# EAGLE board RN41_Rootooth Panel v17 (EAGLE 6.4), part 1 of 2
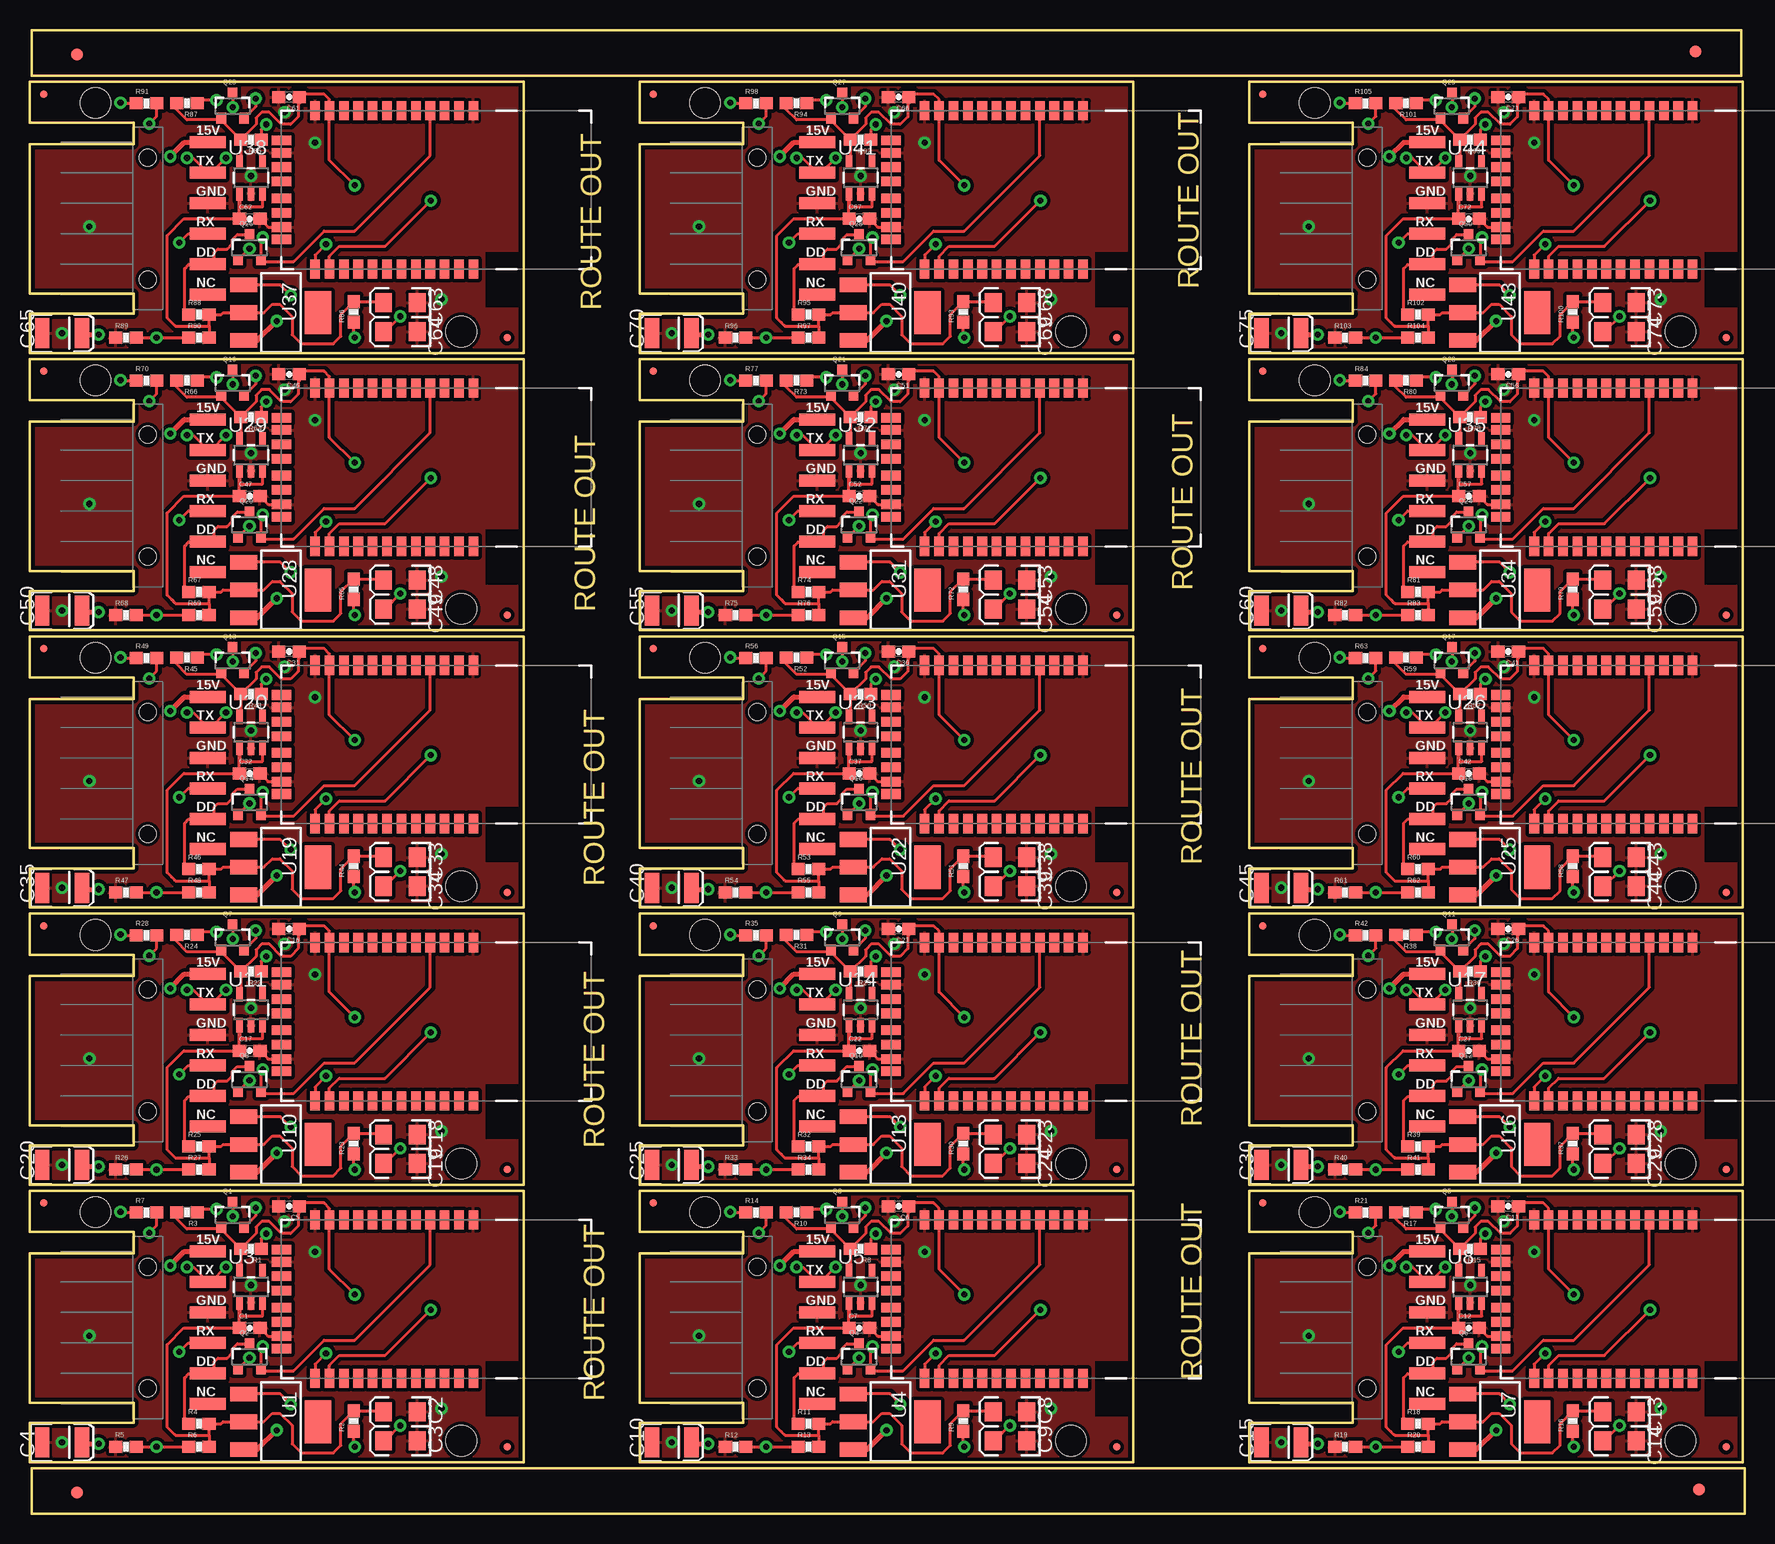
[diagram p0: board, top side]
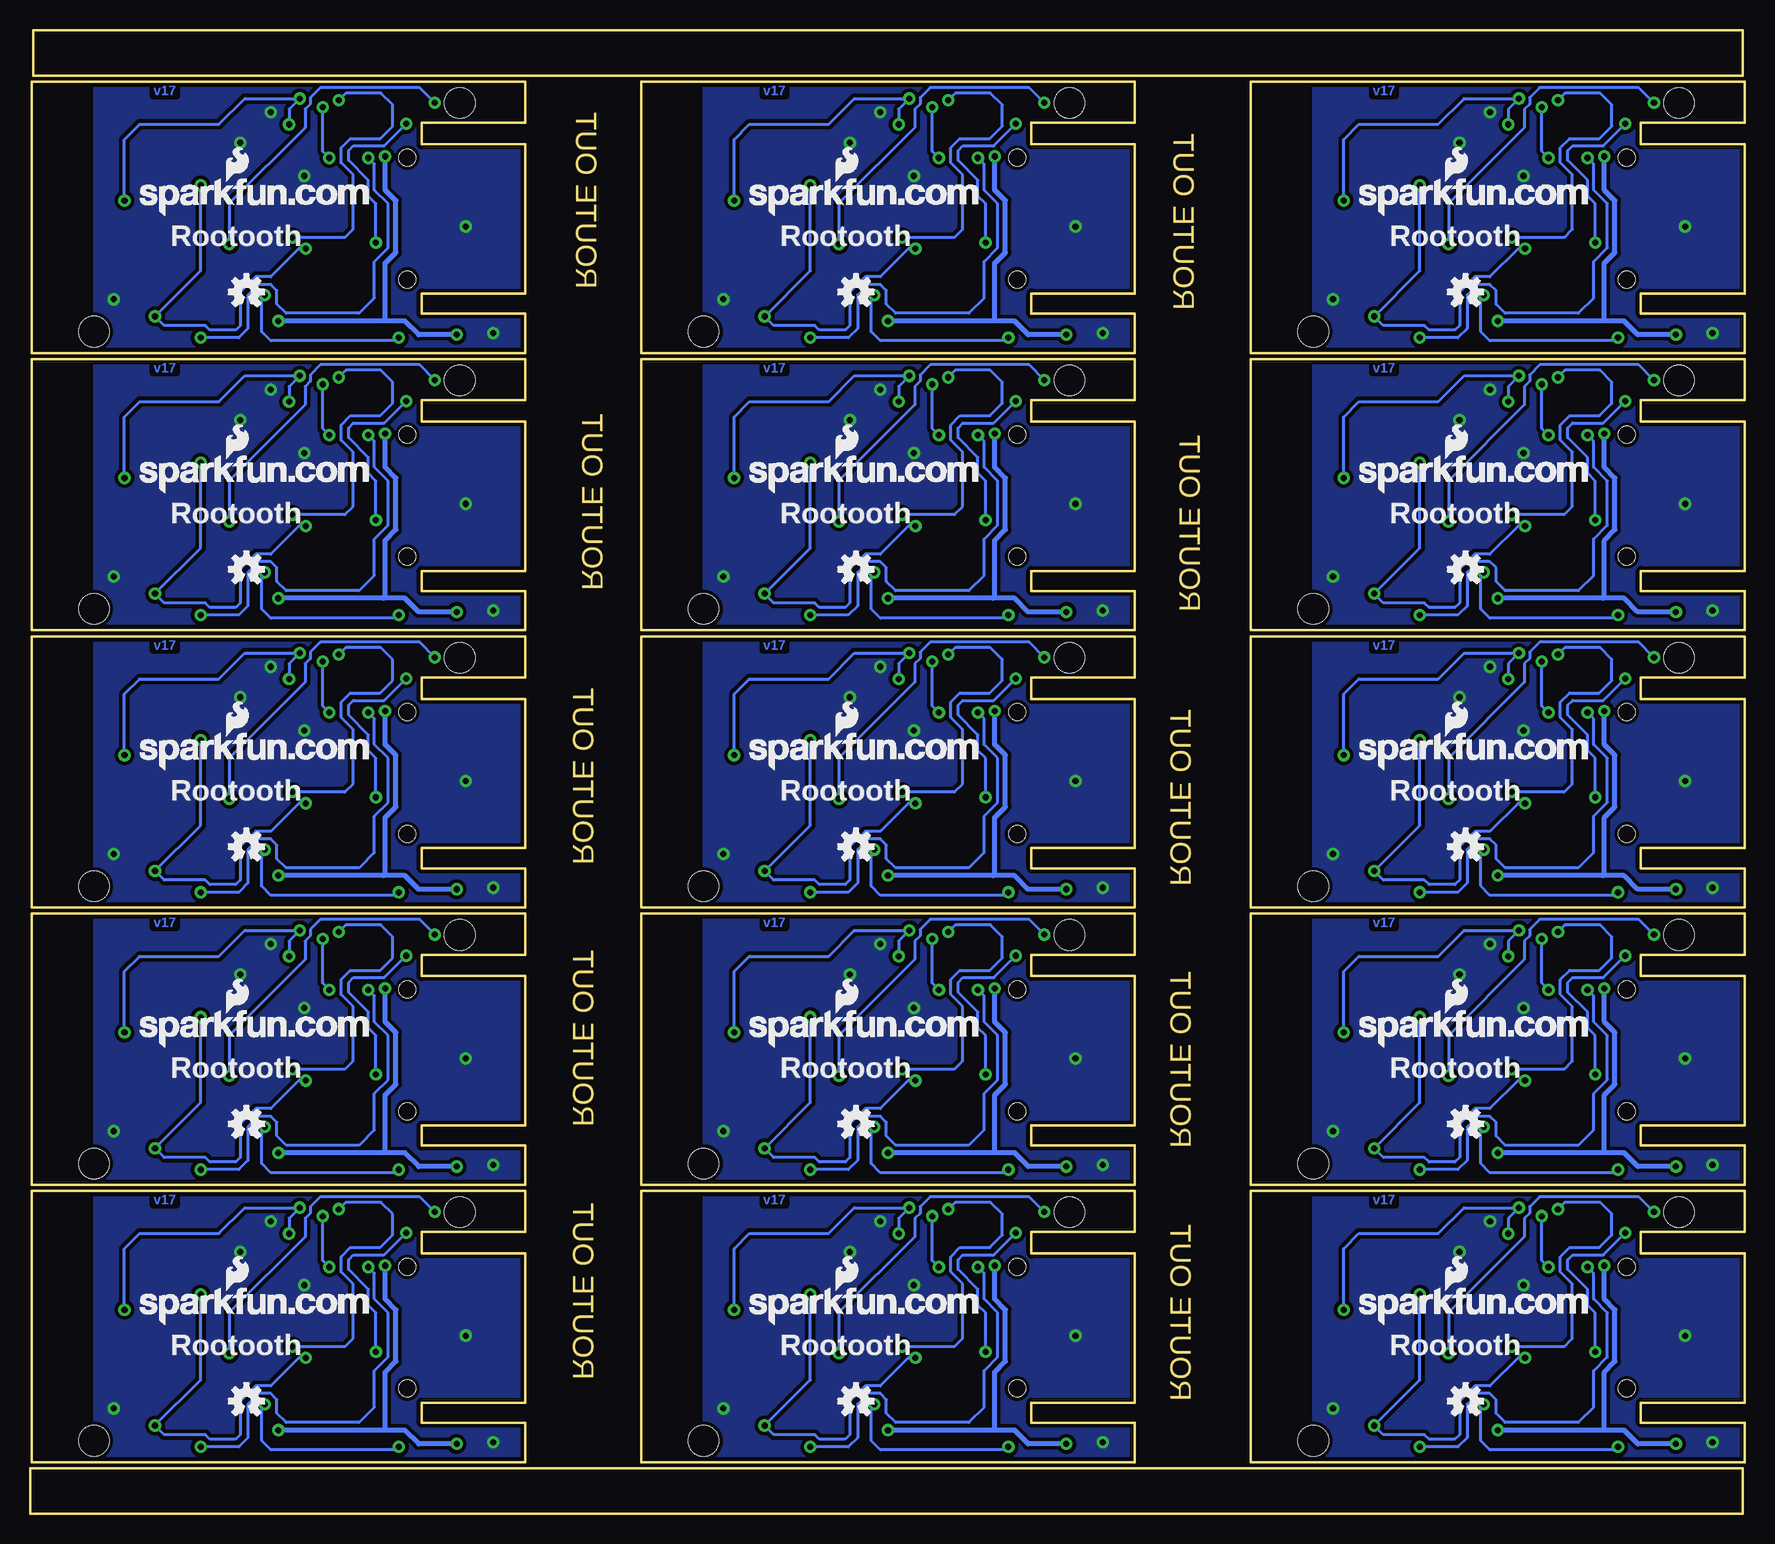
[diagram p1: board, bottom side, seen from below]

Size 142.88 x 123.7 mm. Coordinates in mm from the lower left corner, seen from the top.
Outline: 0,4.32 41.15,4.32 41.15,26.92 0,26.92 0,23.49 8.64,23.49 8.64,21.72 0,21.72 0,9.27 8.64,9.27 8.64,7.59 0,7.59 0,4.32
Outline: 50.8,4.32 91.95,4.32 91.95,26.92 50.8,26.92 50.8,23.49 59.44,23.49 59.44,21.72 50.8,21.72 50.8,9.27 59.44,9.27 59.44,7.59 50.8,7.59 50.8,4.32
Outline: 101.6,4.32 142.75,4.32 142.75,26.92 101.6,26.92 101.6,23.49 110.24,23.49 110.24,21.72 101.6,21.72 101.6,9.27 110.24,9.27 110.24,7.59 101.6,7.59 101.6,4.32
Outline: 0,27.43 41.15,27.43 41.15,50.04 0,50.04 0,46.61 8.64,46.61 8.64,44.83 0,44.83 0,32.38 8.64,32.38 8.64,30.71 0,30.71 0,27.43
Outline: 50.8,27.43 91.95,27.43 91.95,50.04 50.8,50.04 50.8,46.61 59.44,46.61 59.44,44.83 50.8,44.83 50.8,32.38 59.44,32.38 59.44,30.71 50.8,30.71 50.8,27.43
Outline: 101.6,27.43 142.75,27.43 142.75,50.04 101.6,50.04 101.6,46.61 110.24,46.61 110.24,44.83 101.6,44.83 101.6,32.38 110.24,32.38 110.24,30.71 101.6,30.71 101.6,27.43
Outline: 0,50.55 41.15,50.55 41.15,73.15 0,73.15 0,69.72 8.64,69.72 8.64,67.95 0,67.95 0,55.5 8.64,55.5 8.64,53.82 0,53.82 0,50.55
Outline: 50.8,50.55 91.95,50.55 91.95,73.15 50.8,73.15 50.8,69.72 59.44,69.72 59.44,67.95 50.8,67.95 50.8,55.5 59.44,55.5 59.44,53.82 50.8,53.82 50.8,50.55
Outline: 101.6,50.55 142.75,50.55 142.75,73.15 101.6,73.15 101.6,69.72 110.24,69.72 110.24,67.95 101.6,67.95 101.6,55.5 110.24,55.5 110.24,53.82 101.6,53.82 101.6,50.55
Outline: 0,73.66 41.15,73.66 41.15,96.27 0,96.27 0,92.84 8.64,92.84 8.64,91.06 0,91.06 0,78.61 8.64,78.61 8.64,76.94 0,76.94 0,73.66
Outline: 50.8,73.66 91.95,73.66 91.95,96.27 50.8,96.27 50.8,92.84 59.44,92.84 59.44,91.06 50.8,91.06 50.8,78.61 59.44,78.61 59.44,76.94 50.8,76.94 50.8,73.66
Outline: 101.6,73.66 142.75,73.66 142.75,96.27 101.6,96.27 101.6,92.84 110.24,92.84 110.24,91.06 101.6,91.06 101.6,78.61 110.24,78.61 110.24,76.94 101.6,76.94 101.6,73.66
Outline: 0,96.77 41.15,96.77 41.15,119.38 0,119.38 0,115.95 8.64,115.95 8.64,114.17 0,114.17 0,101.73 8.64,101.73 8.64,100.05 0,100.05 0,96.77
Outline: 50.8,96.77 91.95,96.77 91.95,119.38 50.8,119.38 50.8,115.95 59.44,115.95 59.44,114.17 50.8,114.17 50.8,101.73 59.44,101.73 59.44,100.05 50.8,100.05 50.8,96.77
Outline: 101.6,96.77 142.75,96.77 142.75,119.38 101.6,119.38 101.6,115.95 110.24,115.95 110.24,114.17 101.6,114.17 101.6,101.73 110.24,101.73 110.24,100.05 101.6,100.05 101.6,96.77
Outline: 142.88,3.81 0.13,3.81 0.13,0 142.88,0 142.88,3.81
Outline: 142.62,123.7 56.26,123.7 53.72,123.7 0.13,123.7 0.13,119.89 142.62,119.89 142.62,123.7
Copper layers (1*16): Top 0.035mm / dielectric 1.5mm / Bottom 0.035mm
Design rules "SparkFun *": minimum track width 8mil, minimum drill 20mil, track to track 8mil, track to pad 8mil, pad to pad 8mil, via to via 8mil, smd to smd 8mil, copper to edge 10mil, drill to drill 8mil, minimum pad ring 12mil, minimum via ring 10mil, stop-mask expansion 4mil, vias tented up to drill 25mil, thermal gap 10mil
Holes 2.54 mm at 35.94,6.1 5.46,25.15 86.74,6.1 56.26,25.15 137.54,6.1 107.06,25.15 35.94,29.21 5.46,48.26 86.74,29.21 56.26,48.26 137.54,29.21 107.06,48.26 35.94,52.32 5.46,71.37 86.74,52.32 56.26,71.37 137.54,52.32 107.06,71.37 35.94,75.44 5.46,94.49 86.74,75.44 56.26,94.49 137.54,75.44 107.06,94.49 35.94,98.55 5.46,117.6 86.74,98.55 56.26,117.6 137.54,98.55 107.06,117.6

## Footprints (pad centres in the part's own frame; a part is rotated, then mirrored left to right if it is on the bottom)
0603-CAP = smd 1.1 x 1: 1 -0.85,0; 2 0.85,0
EIA3216 = smd 1.4 x 1.6: A 1.4,0; C -1.4,0
EIA3528 = smd 1.2 x 2.5: A 1.65,0; C -1.65,0
FIDUCIAL-1X2 = smd 1 x 1: 1 0,0
MICRO-FIDUCIAL = smd 0.635 x 0.635: 1 0,0
1X06-SMD = smd 1 x 3: 1 -6.35,5; 2 -3.81,5; 3 -1.27,5; 4 1.27,5; 5 3.81,5; 6 6.35,5 | hole 1.4: -5.08,0; 5.08,0
SOT23-3 = smd 0.8 x 0.9: 1 -0.95,-1; 2 0.95,-1; 3 0,1.1
0603-RES = smd 1.1 x 1: 1 -0.85,0; 2 0.85,0
SOT223 = smd 1.219 x 2.235: 1 -2.311,-3.099; 2 0,-3.099; 3 2.311,-3.099 | smd 3.6 x 2.2: 4 0,3.099
RN41 = smd 0.8 x 1.6: 1 -6.6,-6.6; 2 -5.4,-6.6; 3 -4.2,-6.6; 4 -3,-6.6; 5 -1.8,-6.6; 6 -0.6,-6.6; 7 0.6,-6.6; 8 1.8,-6.6; 9 3,-6.6; 10 4.2,-6.6; 11 5.4,-6.6; 12 6.6,-6.6; 13 6.6,6.6; 14 5.4,6.6; 15 4.2,6.6; 16 3,6.6; 17 1.8,6.6; 18 0.6,6.6; 19 -0.6,6.6; 20 -1.8,6.6; 21 -3,6.6; 22 -4.2,6.6; 23 -5.4,6.6; 24 -6.6,6.6 | smd 1.6 x 0.8: 28 9.4,3.1; 29 9.4,-3.1; 30 9.4,4.122; 31 9.4,1.9; 32 9.4,0.7; 33 9.4,-0.7; 34 9.4,-1.9; 35 9.4,-4.122
SOT23-5 = smd 0.55 x 1.2: 1 -0.95,-1.3; 2 0,-1.3; 3 0.95,-1.3; 4 0.95,1.3; 5 -0.95,1.3

## Placement (x,y rotation side)
C1  0.1uF  [0603-CAP]  18.31,15.49 0 top
C2  10uF  [EIA3216]  30.86,8.51 180 top
C3  10uF  [EIA3216]  30.86,6.1 180 top
C4  10uF/20V  [EIA3528]  2.67,5.97 0 top
C5  0.1uF  [0603-CAP]  21.59,25.65 180 top
C6  0.1uF  [0603-CAP]  72.39,25.65 180 top
C7  0.1uF  [0603-CAP]  69.11,15.49 0 top
C8  10uF  [EIA3216]  81.66,8.51 180 top
C9  10uF  [EIA3216]  81.66,6.1 180 top
C10  10uF/20V  [EIA3528]  53.47,5.97 0 top
C11  0.1uF  [0603-CAP]  123.19,25.65 180 top
C12  0.1uF  [0603-CAP]  119.91,15.49 0 top
C13  10uF  [EIA3216]  132.46,8.51 180 top
C14  10uF  [EIA3216]  132.46,6.1 180 top
C15  10uF/20V  [EIA3528]  104.27,5.97 0 top
C16  0.1uF  [0603-CAP]  21.59,48.77 180 top
C17  0.1uF  [0603-CAP]  18.31,38.61 0 top
C18  10uF  [EIA3216]  30.86,31.62 180 top
C19  10uF  [EIA3216]  30.86,29.21 180 top
C20  10uF/20V  [EIA3528]  2.67,29.08 0 top
C21  0.1uF  [0603-CAP]  72.39,48.77 180 top
C22  0.1uF  [0603-CAP]  69.11,38.61 0 top
C23  10uF  [EIA3216]  81.66,31.62 180 top
C24  10uF  [EIA3216]  81.66,29.21 180 top
C25  10uF/20V  [EIA3528]  53.47,29.08 0 top
C26  0.1uF  [0603-CAP]  123.19,48.77 180 top
C27  0.1uF  [0603-CAP]  119.91,38.61 0 top
C28  10uF  [EIA3216]  132.46,31.62 180 top
C29  10uF  [EIA3216]  132.46,29.21 180 top
C30  10uF/20V  [EIA3528]  104.27,29.08 0 top
C31  0.1uF  [0603-CAP]  21.59,71.88 180 top
C32  0.1uF  [0603-CAP]  18.31,61.72 0 top
C33  10uF  [EIA3216]  30.86,54.74 180 top
C34  10uF  [EIA3216]  30.86,52.32 180 top
C35  10uF/20V  [EIA3528]  2.67,52.2 0 top
C36  0.1uF  [0603-CAP]  72.39,71.88 180 top
C37  0.1uF  [0603-CAP]  69.11,61.72 0 top
C38  10uF  [EIA3216]  81.66,54.74 180 top
C39  10uF  [EIA3216]  81.66,52.32 180 top
C40  10uF/20V  [EIA3528]  53.47,52.2 0 top
C41  0.1uF  [0603-CAP]  123.19,71.88 180 top
C42  0.1uF  [0603-CAP]  119.91,61.72 0 top
C43  10uF  [EIA3216]  132.46,54.74 180 top
C44  10uF  [EIA3216]  132.46,52.32 180 top
C45  10uF/20V  [EIA3528]  104.27,52.2 0 top
C46  0.1uF  [0603-CAP]  21.59,95 180 top
C47  0.1uF  [0603-CAP]  18.31,84.84 0 top
C48  10uF  [EIA3216]  30.86,77.85 180 top
C49  10uF  [EIA3216]  30.86,75.44 180 top
C50  10uF/20V  [EIA3528]  2.67,75.31 0 top
C51  0.1uF  [0603-CAP]  72.39,95 180 top
C52  0.1uF  [0603-CAP]  69.11,84.84 0 top
C53  10uF  [EIA3216]  81.66,77.85 180 top
C54  10uF  [EIA3216]  81.66,75.44 180 top
C55  10uF/20V  [EIA3528]  53.47,75.31 0 top
C56  0.1uF  [0603-CAP]  123.19,95 180 top
C57  0.1uF  [0603-CAP]  119.91,84.84 0 top
C58  10uF  [EIA3216]  132.46,77.85 180 top
C59  10uF  [EIA3216]  132.46,75.44 180 top
C60  10uF/20V  [EIA3528]  104.27,75.31 0 top
C61  0.1uF  [0603-CAP]  21.59,118.11 180 top
C62  0.1uF  [0603-CAP]  18.31,107.95 0 top
C63  10uF  [EIA3216]  30.86,100.97 180 top
C64  10uF  [EIA3216]  30.86,98.55 180 top
C65  10uF/20V  [EIA3528]  2.67,98.42 0 top
C66  0.1uF  [0603-CAP]  72.39,118.11 180 top
C67  0.1uF  [0603-CAP]  69.11,107.95 0 top
C68  10uF  [EIA3216]  81.66,100.97 180 top
C69  10uF  [EIA3216]  81.66,98.55 180 top
C70  10uF/20V  [EIA3528]  53.47,98.42 0 top
C71  0.1uF  [0603-CAP]  123.19,118.11 180 top
C72  0.1uF  [0603-CAP]  119.91,107.95 0 top
C73  10uF  [EIA3216]  132.46,100.97 180 top
C74  10uF  [EIA3216]  132.46,98.55 180 top
C75  10uF/20V  [EIA3528]  104.27,98.42 0 top
E$1  [FIDUCIAL-1X2]  139.06,2.03 90 top
E$2  [FIDUCIAL-1X2]  3.94,1.78 270 top
E$3  [FIDUCIAL-1X2]  138.81,121.92 90 top
E$4  [FIDUCIAL-1X2]  3.94,121.67 270 top
JP1  FIDUCIALUFIDUCIAL  [MICRO-FIDUCIAL]  1.14,25.91 0 top
JP2  [1X06-SMD]  9.82,15.53 270 top
JP3  FIDUCIALUFIDUCIAL  [MICRO-FIDUCIAL]  39.75,5.59 0 top
JP4  [1X06-SMD]  60.62,15.53 270 top
JP5  FIDUCIALUFIDUCIAL  [MICRO-FIDUCIAL]  51.94,25.91 0 top
JP6  FIDUCIALUFIDUCIAL  [MICRO-FIDUCIAL]  90.55,5.59 0 top
JP7  [1X06-SMD]  111.42,15.53 270 top
JP8  FIDUCIALUFIDUCIAL  [MICRO-FIDUCIAL]  102.74,25.91 0 top
JP9  FIDUCIALUFIDUCIAL  [MICRO-FIDUCIAL]  141.35,5.59 0 top
JP10  [1X06-SMD]  9.82,38.64 270 top
JP11  FIDUCIALUFIDUCIAL  [MICRO-FIDUCIAL]  1.14,49.02 0 top
JP12  FIDUCIALUFIDUCIAL  [MICRO-FIDUCIAL]  39.75,28.7 0 top
JP13  [1X06-SMD]  60.62,38.64 270 top
JP14  FIDUCIALUFIDUCIAL  [MICRO-FIDUCIAL]  51.94,49.02 0 top
JP15  FIDUCIALUFIDUCIAL  [MICRO-FIDUCIAL]  90.55,28.7 0 top
JP16  [1X06-SMD]  111.42,38.64 270 top
JP17  FIDUCIALUFIDUCIAL  [MICRO-FIDUCIAL]  102.74,49.02 0 top
JP18  FIDUCIALUFIDUCIAL  [MICRO-FIDUCIAL]  141.35,28.7 0 top
JP19  [1X06-SMD]  9.82,61.76 270 top
JP20  FIDUCIALUFIDUCIAL  [MICRO-FIDUCIAL]  1.14,72.14 0 top
JP21  FIDUCIALUFIDUCIAL  [MICRO-FIDUCIAL]  39.75,51.82 0 top
JP22  [1X06-SMD]  60.62,61.76 270 top
JP23  FIDUCIALUFIDUCIAL  [MICRO-FIDUCIAL]  51.94,72.14 0 top
JP24  FIDUCIALUFIDUCIAL  [MICRO-FIDUCIAL]  90.55,51.82 0 top
JP25  [1X06-SMD]  111.42,61.76 270 top
JP26  FIDUCIALUFIDUCIAL  [MICRO-FIDUCIAL]  102.74,72.14 0 top
JP27  FIDUCIALUFIDUCIAL  [MICRO-FIDUCIAL]  141.35,51.82 0 top
JP28  [1X06-SMD]  9.82,84.87 270 top
JP29  FIDUCIALUFIDUCIAL  [MICRO-FIDUCIAL]  1.14,95.25 0 top
JP30  FIDUCIALUFIDUCIAL  [MICRO-FIDUCIAL]  39.75,74.93 0 top
JP31  [1X06-SMD]  60.62,84.87 270 top
JP32  FIDUCIALUFIDUCIAL  [MICRO-FIDUCIAL]  51.94,95.25 0 top
JP33  FIDUCIALUFIDUCIAL  [MICRO-FIDUCIAL]  90.55,74.93 0 top
JP34  [1X06-SMD]  111.42,84.87 270 top
JP35  FIDUCIALUFIDUCIAL  [MICRO-FIDUCIAL]  102.74,95.25 0 top
JP36  FIDUCIALUFIDUCIAL  [MICRO-FIDUCIAL]  141.35,74.93 0 top
JP37  [1X06-SMD]  9.82,107.99 270 top
JP38  FIDUCIALUFIDUCIAL  [MICRO-FIDUCIAL]  1.14,118.36 0 top
JP39  FIDUCIALUFIDUCIAL  [MICRO-FIDUCIAL]  39.75,98.04 0 top
JP40  [1X06-SMD]  60.62,107.99 270 top
JP41  FIDUCIALUFIDUCIAL  [MICRO-FIDUCIAL]  51.94,118.36 0 top
JP42  FIDUCIALUFIDUCIAL  [MICRO-FIDUCIAL]  90.55,98.04 0 top
JP43  [1X06-SMD]  111.42,107.99 270 top
JP44  FIDUCIALUFIDUCIAL  [MICRO-FIDUCIAL]  102.74,118.36 0 top
JP45  FIDUCIALUFIDUCIAL  [MICRO-FIDUCIAL]  141.35,98.04 0 top
LOGO1  OSHW-LOGOS  [OSHW-LOGO-S]  23.24,9.4 0 bottom
LOGO2  OSHW-LOGOS  [OSHW-LOGO-S]  74.04,9.4 0 bottom
LOGO3  OSHW-LOGOS  [OSHW-LOGO-S]  124.84,9.4 0 bottom
LOGO4  OSHW-LOGOS  [OSHW-LOGO-S]  23.24,32.51 0 bottom
LOGO5  OSHW-LOGOS  [OSHW-LOGO-S]  74.04,32.51 0 bottom
LOGO6  OSHW-LOGOS  [OSHW-LOGO-S]  124.84,32.51 0 bottom
LOGO7  OSHW-LOGOS  [OSHW-LOGO-S]  23.24,55.63 0 bottom
LOGO8  OSHW-LOGOS  [OSHW-LOGO-S]  74.04,55.63 0 bottom
LOGO9  OSHW-LOGOS  [OSHW-LOGO-S]  124.84,55.63 0 bottom
LOGO10  OSHW-LOGOS  [OSHW-LOGO-S]  23.24,78.74 0 bottom
LOGO11  OSHW-LOGOS  [OSHW-LOGO-S]  74.04,78.74 0 bottom
LOGO12  OSHW-LOGOS  [OSHW-LOGO-S]  124.84,78.74 0 bottom
LOGO13  OSHW-LOGOS  [OSHW-LOGO-S]  23.24,101.85 0 bottom
LOGO14  OSHW-LOGOS  [OSHW-LOGO-S]  74.04,101.85 0 bottom
LOGO15  OSHW-LOGOS  [OSHW-LOGO-S]  124.84,101.85 0 bottom
Q1  MOSFET-NCHANNELSMD  [SOT23-3]  16.89,24.89 0 top
Q2  MOSFET-NCHANNELSMD  [SOT23-3]  18.29,13.08 0 top
Q3  MOSFET-NCHANNELSMD  [SOT23-3]  67.69,24.89 0 top
Q4  MOSFET-NCHANNELSMD  [SOT23-3]  69.09,13.08 0 top
Q5  MOSFET-NCHANNELSMD  [SOT23-3]  118.49,24.89 0 top
Q6  MOSFET-NCHANNELSMD  [SOT23-3]  119.89,13.08 0 top
Q7  MOSFET-NCHANNELSMD  [SOT23-3]  16.89,48.01 0 top
Q8  MOSFET-NCHANNELSMD  [SOT23-3]  18.29,36.2 0 top
Q9  MOSFET-NCHANNELSMD  [SOT23-3]  67.69,48.01 0 top
Q10  MOSFET-NCHANNELSMD  [SOT23-3]  69.09,36.2 0 top
Q11  MOSFET-NCHANNELSMD  [SOT23-3]  118.49,48.01 0 top
Q12  MOSFET-NCHANNELSMD  [SOT23-3]  119.89,36.2 0 top
Q13  MOSFET-NCHANNELSMD  [SOT23-3]  16.89,71.12 0 top
Q14  MOSFET-NCHANNELSMD  [SOT23-3]  18.29,59.31 0 top
Q15  MOSFET-NCHANNELSMD  [SOT23-3]  67.69,71.12 0 top
Q16  MOSFET-NCHANNELSMD  [SOT23-3]  69.09,59.31 0 top
Q17  MOSFET-NCHANNELSMD  [SOT23-3]  118.49,71.12 0 top
Q18  MOSFET-NCHANNELSMD  [SOT23-3]  119.89,59.31 0 top
Q19  MOSFET-NCHANNELSMD  [SOT23-3]  16.89,94.23 0 top
Q20  MOSFET-NCHANNELSMD  [SOT23-3]  18.29,82.42 0 top
Q21  MOSFET-NCHANNELSMD  [SOT23-3]  67.69,94.23 0 top
Q22  MOSFET-NCHANNELSMD  [SOT23-3]  69.09,82.42 0 top
Q23  MOSFET-NCHANNELSMD  [SOT23-3]  118.49,94.23 0 top
Q24  MOSFET-NCHANNELSMD  [SOT23-3]  119.89,82.42 0 top
Q25  MOSFET-NCHANNELSMD  [SOT23-3]  16.89,117.35 0 top
Q26  MOSFET-NCHANNELSMD  [SOT23-3]  18.29,105.54 0 top
Q27  MOSFET-NCHANNELSMD  [SOT23-3]  67.69,117.35 0 top
Q28  MOSFET-NCHANNELSMD  [SOT23-3]  69.09,105.54 0 top
Q29  MOSFET-NCHANNELSMD  [SOT23-3]  118.49,117.35 0 top
Q30  MOSFET-NCHANNELSMD  [SOT23-3]  119.89,105.54 0 top
R1  10k  [0603-RES]  18.41,22.1 180 top
R2  10k  [0603-RES]  26.97,7.75 90 top
R3  10k  [0603-RES]  13.08,25.15 180 top
R4  10k  [0603-RES]  14.07,7.52 0 top
R5  715  [0603-RES]  8,5.59 0 top
R6  240  [0603-RES]  14.07,5.59 0 top
R7  10k  [0603-RES]  9.7,25.12 0 top
R8  10k  [0603-RES]  69.22,22.1 180 top
R9  10k  [0603-RES]  77.77,7.75 90 top
R10  10k  [0603-RES]  63.88,25.15 180 top
R11  10k  [0603-RES]  64.87,7.52 0 top
R12  715  [0603-RES]  58.8,5.59 0 top
R13  240  [0603-RES]  64.87,5.59 0 top
R14  10k  [0603-RES]  60.5,25.12 0 top
R15  10k  [0603-RES]  120.02,22.1 180 top
R16  10k  [0603-RES]  128.57,7.75 90 top
R17  10k  [0603-RES]  114.68,25.15 180 top
R18  10k  [0603-RES]  115.67,7.52 0 top
R19  715  [0603-RES]  109.6,5.59 0 top
R20  240  [0603-RES]  115.67,5.59 0 top
R21  10k  [0603-RES]  111.3,25.12 0 top
R22  10k  [0603-RES]  18.41,45.21 180 top
R23  10k  [0603-RES]  26.97,30.86 90 top
R24  10k  [0603-RES]  13.08,48.26 180 top
R25  10k  [0603-RES]  14.07,30.63 0 top
R26  715  [0603-RES]  8,28.7 0 top
R27  240  [0603-RES]  14.07,28.7 0 top
R28  10k  [0603-RES]  9.7,48.23 0 top
R29  10k  [0603-RES]  69.22,45.21 180 top
R30  10k  [0603-RES]  77.77,30.86 90 top
R31  10k  [0603-RES]  63.88,48.26 180 top
R32  10k  [0603-RES]  64.87,30.63 0 top
R33  715  [0603-RES]  58.8,28.7 0 top
R34  240  [0603-RES]  64.87,28.7 0 top
R35  10k  [0603-RES]  60.5,48.23 0 top
R36  10k  [0603-RES]  120.02,45.21 180 top
R37  10k  [0603-RES]  128.57,30.86 90 top
R38  10k  [0603-RES]  114.68,48.26 180 top
R39  10k  [0603-RES]  115.67,30.63 0 top
R40  715  [0603-RES]  109.6,28.7 0 top
R41  240  [0603-RES]  115.67,28.7 0 top
R42  10k  [0603-RES]  111.3,48.23 0 top
R43  10k  [0603-RES]  18.41,68.33 180 top
R44  10k  [0603-RES]  26.97,53.97 90 top
R45  10k  [0603-RES]  13.08,71.37 180 top
R46  10k  [0603-RES]  14.07,53.75 0 top
R47  715  [0603-RES]  8,51.82 0 top
R48  240  [0603-RES]  14.07,51.82 0 top
R49  10k  [0603-RES]  9.7,71.35 0 top
R50  10k  [0603-RES]  69.22,68.33 180 top
R51  10k  [0603-RES]  77.77,53.97 90 top
R52  10k  [0603-RES]  63.88,71.37 180 top
R53  10k  [0603-RES]  64.87,53.75 0 top
R54  715  [0603-RES]  58.8,51.82 0 top
R55  240  [0603-RES]  64.87,51.82 0 top
R56  10k  [0603-RES]  60.5,71.35 0 top
R57  10k  [0603-RES]  120.02,68.33 180 top
R58  10k  [0603-RES]  128.57,53.97 90 top
R59  10k  [0603-RES]  114.68,71.37 180 top
R60  10k  [0603-RES]  115.67,53.75 0 top
R61  715  [0603-RES]  109.6,51.82 0 top
R62  240  [0603-RES]  115.67,51.82 0 top
R63  10k  [0603-RES]  111.3,71.35 0 top
R64  10k  [0603-RES]  18.41,91.44 180 top
R65  10k  [0603-RES]  26.97,77.09 90 top
R66  10k  [0603-RES]  13.08,94.49 180 top
R67  10k  [0603-RES]  14.07,76.86 0 top
R68  715  [0603-RES]  8,74.93 0 top
R69  240  [0603-RES]  14.07,74.93 0 top
R70  10k  [0603-RES]  9.7,94.46 0 top
R71  10k  [0603-RES]  69.22,91.44 180 top
R72  10k  [0603-RES]  77.77,77.09 90 top
R73  10k  [0603-RES]  63.88,94.49 180 top
R74  10k  [0603-RES]  64.87,76.86 0 top
R75  715  [0603-RES]  58.8,74.93 0 top
R76  240  [0603-RES]  64.87,74.93 0 top
R77  10k  [0603-RES]  60.5,94.46 0 top
R78  10k  [0603-RES]  120.02,91.44 180 top
R79  10k  [0603-RES]  128.57,77.09 90 top
R80  10k  [0603-RES]  114.68,94.49 180 top
R81  10k  [0603-RES]  115.67,76.86 0 top
R82  715  [0603-RES]  109.6,74.93 0 top
R83  240  [0603-RES]  115.67,74.93 0 top
R84  10k  [0603-RES]  111.3,94.46 0 top
R85  10k  [0603-RES]  18.41,114.55 180 top
R86  10k  [0603-RES]  26.97,100.2 90 top
R87  10k  [0603-RES]  13.08,117.6 180 top
R88  10k  [0603-RES]  14.07,99.97 0 top
R89  715  [0603-RES]  8,98.04 0 top
R90  240  [0603-RES]  14.07,98.04 0 top
R91  10k  [0603-RES]  9.7,117.58 0 top
R92  10k  [0603-RES]  69.22,114.55 180 top
R93  10k  [0603-RES]  77.77,100.2 90 top
R94  10k  [0603-RES]  63.88,117.6 180 top
R95  10k  [0603-RES]  64.87,99.97 0 top
R96  715  [0603-RES]  58.8,98.04 0 top
R97  240  [0603-RES]  64.87,98.04 0 top
R98  10k  [0603-RES]  60.5,117.58 0 top
R99  10k  [0603-RES]  120.02,114.55 180 top
R100  10k  [0603-RES]  128.57,100.2 90 top
R101  10k  [0603-RES]  114.68,117.6 180 top
R102  10k  [0603-RES]  115.67,99.97 0 top
R103  715  [0603-RES]  109.6,98.04 0 top
R104  240  [0603-RES]  115.67,98.04 0 top
R105  10k  [0603-RES]  111.3,117.58 0 top
U1  V_REG_317SMD  [SOT223]  20.91,7.68 270 top
U2  BLUETOOTH-RN41  [RN41]  30.35,17.91 180 top
U3  V_REG_LDOSMD  [SOT23-5]  18.41,18.92 0 top
U4  V_REG_317SMD  [SOT223]  71.71,7.68 270 top
U5  V_REG_LDOSMD  [SOT23-5]  69.22,18.92 0 top
U6  BLUETOOTH-RN41  [RN41]  81.15,17.91 180 top
U7  V_REG_317SMD  [SOT223]  122.51,7.68 270 top
U8  V_REG_LDOSMD  [SOT23-5]  120.02,18.92 0 top
U9  BLUETOOTH-RN41  [RN41]  131.95,17.91 180 top
U10  V_REG_317SMD  [SOT223]  20.91,30.79 270 top
U11  V_REG_LDOSMD  [SOT23-5]  18.41,42.04 0 top
U12  BLUETOOTH-RN41  [RN41]  30.35,41.02 180 top
U13  V_REG_317SMD  [SOT223]  71.71,30.79 270 top
U14  V_REG_LDOSMD  [SOT23-5]  69.22,42.04 0 top
U15  BLUETOOTH-RN41  [RN41]  81.15,41.02 180 top
U16  V_REG_317SMD  [SOT223]  122.51,30.79 270 top
U17  V_REG_LDOSMD  [SOT23-5]  120.02,42.04 0 top
U18  BLUETOOTH-RN41  [RN41]  131.95,41.02 180 top
U19  V_REG_317SMD  [SOT223]  20.91,53.91 270 top
U20  V_REG_LDOSMD  [SOT23-5]  18.41,65.15 0 top
U21  BLUETOOTH-RN41  [RN41]  30.35,64.14 180 top
U22  V_REG_317SMD  [SOT223]  71.71,53.91 270 top
U23  V_REG_LDOSMD  [SOT23-5]  69.22,65.15 0 top
U24  BLUETOOTH-RN41  [RN41]  81.15,64.14 180 top
U25  V_REG_317SMD  [SOT223]  122.51,53.91 270 top
U26  V_REG_LDOSMD  [SOT23-5]  120.02,65.15 0 top
U27  BLUETOOTH-RN41  [RN41]  131.95,64.14 180 top
U28  V_REG_317SMD  [SOT223]  20.91,77.02 270 top
U29  V_REG_LDOSMD  [SOT23-5]  18.41,88.27 0 top
U30  BLUETOOTH-RN41  [RN41]  30.35,87.25 180 top
U31  V_REG_317SMD  [SOT223]  71.71,77.02 270 top
U32  V_REG_LDOSMD  [SOT23-5]  69.22,88.27 0 top
U33  BLUETOOTH-RN41  [RN41]  81.15,87.25 180 top
U34  V_REG_317SMD  [SOT223]  122.51,77.02 270 top
U35  V_REG_LDOSMD  [SOT23-5]  120.02,88.27 0 top
U36  BLUETOOTH-RN41  [RN41]  131.95,87.25 180 top
U37  V_REG_317SMD  [SOT223]  20.91,100.13 270 top
U38  V_REG_LDOSMD  [SOT23-5]  18.41,111.38 0 top
U39  BLUETOOTH-RN41  [RN41]  30.35,110.36 180 top
U40  V_REG_317SMD  [SOT223]  71.71,100.13 270 top
U41  V_REG_LDOSMD  [SOT23-5]  69.22,111.38 0 top
U42  BLUETOOTH-RN41  [RN41]  81.15,110.36 180 top
U43  V_REG_317SMD  [SOT223]  122.51,100.13 270 top
U44  V_REG_LDOSMD  [SOT23-5]  120.02,111.38 0 top
U45  BLUETOOTH-RN41  [RN41]  131.95,110.36 180 top
U$1  LOGO-SFENEW  [SFE-NEW-WEBLOGO]  32.13,15.75 0 bottom
U$2  LOGO-SFENEW  [SFE-NEW-WEBLOGO]  82.93,15.75 0 bottom
U$3  LOGO-SFENEW  [SFE-NEW-WEBLOGO]  133.73,15.75 0 bottom
U$4  LOGO-SFENEW  [SFE-NEW-WEBLOGO]  32.13,38.86 0 bottom
U$5  LOGO-SFENEW  [SFE-NEW-WEBLOGO]  82.93,38.86 0 bottom
U$6  LOGO-SFENEW  [SFE-NEW-WEBLOGO]  133.73,38.86 0 bottom
U$7  LOGO-SFENEW  [SFE-NEW-WEBLOGO]  32.13,61.98 0 bottom
U$8  LOGO-SFENEW  [SFE-NEW-WEBLOGO]  82.93,61.98 0 bottom
U$9  LOGO-SFENEW  [SFE-NEW-WEBLOGO]  133.73,61.98 0 bottom
U$10  LOGO-SFENEW  [SFE-NEW-WEBLOGO]  32.13,85.09 0 bottom
U$11  LOGO-SFENEW  [SFE-NEW-WEBLOGO]  82.93,85.09 0 bottom
U$12  LOGO-SFENEW  [SFE-NEW-WEBLOGO]  133.73,85.09 0 bottom
U$13  LOGO-SFENEW  [SFE-NEW-WEBLOGO]  32.13,108.2 0 bottom
U$14  LOGO-SFENEW  [SFE-NEW-WEBLOGO]  82.93,108.2 0 bottom
U$15  LOGO-SFENEW  [SFE-NEW-WEBLOGO]  133.73,108.2 0 bottom

## Library data of the parts
C1-C75 JP1-JP45 Q1-Q30 R1-R105 U1 U3-U5 U7 U8 U10 U11 U13 U14 U16 U17 U19 U20 U22 U23 U25 U26 U28 U29 U31 U32 U34 U35 U37 U38 U40 U41 U43 U44 U$1-U$15 = SparkFun
E$1-E$4 LOGO1-LOGO15 = SparkFun-Aesthetics
U2 U6 U9 U12 U15 U18 U21 U24 U27 U30 U33 U36 U39 U42 U45 = SparkFun-RF

## Nets
5V: C1.1 C2.A R2.2 R4.2 R6.2 U1.2 U3.1 U3.3
5V1: C7.1 C8.A R9.2 R11.2 R13.2 U4.2 U5.1 U5.3
5V2: C12.1 C13.A R16.2 R18.2 R20.2 U7.2 U8.1 U8.3
5V3: C17.1 C18.A R23.2 R25.2 R27.2 U10.2 U11.1 U11.3
5V4: C22.1 C23.A R30.2 R32.2 R34.2 U13.2 U14.1 U14.3
5V5: C27.1 C28.A R37.2 R39.2 R41.2 U16.2 U17.1 U17.3
5V6: C32.1 C33.A R44.2 R46.2 R48.2 U19.2 U20.1 U20.3
5V7: C37.1 C38.A R51.2 R53.2 R55.2 U22.2 U23.1 U23.3
5V8: C42.1 C43.A R58.2 R60.2 R62.2 U25.2 U26.1 U26.3
5V9: C47.1 C48.A R65.2 R67.2 R69.2 U28.2 U29.1 U29.3
5V10: C52.1 C53.A R72.2 R74.2 R76.2 U31.2 U32.1 U32.3
5V11: C57.1 C58.A R79.2 R81.2 R83.2 U34.2 U35.1 U35.3
5V12: C62.1 C63.A R86.2 R88.2 R90.2 U37.2 U38.1 U38.3
5V13: C67.1 C68.A R93.2 R95.2 R97.2 U40.2 U41.1 U41.3
5V14: C72.1 C73.A R100.2 R102.2 R104.2 U43.2 U44.1 U44.3
15V: C4.A JP2.1 U1.3
15V1: C10.A JP4.1 U4.3
15V2: C15.A JP7.1 U7.3
15V3: C20.A JP10.1 U10.3
15V4: C25.A JP13.1 U13.3
15V5: C30.A JP16.1 U16.3
15V6: C35.A JP19.1 U19.3
15V7: C40.A JP22.1 U22.3
15V8: C45.A JP25.1 U25.3
15V9: C50.A JP28.1 U28.3
15V10: C55.A JP31.1 U31.3
15V11: C60.A JP34.1 U34.3
15V12: C65.A JP37.1 U37.3
15V13: C70.A JP40.1 U40.3
15V14: C75.A JP43.1 U43.3
DD: Q2.2 R3.1 U2.4
DD1: Q4.2 R10.1 U6.4
DD2: Q6.2 R17.1 U9.4
DD3: Q8.2 R24.1 U12.4
DD4: Q10.2 R31.1 U15.4
DD5: Q12.2 R38.1 U18.4
DD6: Q14.2 R45.1 U21.4
DD7: Q16.2 R52.1 U24.4
DD8: Q18.2 R59.1 U27.4
DD9: Q20.2 R66.1 U30.4
DD10: Q22.2 R73.1 U33.4
DD11: Q24.2 R80.1 U36.4
DD12: Q26.2 R87.1 U39.4
DD13: Q28.2 R94.1 U42.4
DD14: Q30.2 R101.1 U45.4
DD_5V: JP2.5 Q2.3 R4.1
DD_5V1: JP4.5 Q4.3 R11.1
DD_5V2: JP7.5 Q6.3 R18.1
DD_5V3: JP10.5 Q8.3 R25.1
DD_5V4: JP13.5 Q10.3 R32.1
DD_5V5: JP16.5 Q12.3 R39.1
DD_5V6: JP19.5 Q14.3 R46.1
DD_5V7: JP22.5 Q16.3 R53.1
DD_5V8: JP25.5 Q18.3 R60.1
DD_5V9: JP28.5 Q20.3 R67.1
DD_5V10: JP31.5 Q22.3 R74.1
DD_5V11: JP34.5 Q24.3 R81.1
DD_5V12: JP37.5 Q26.3 R88.1
DD_5V13: JP40.5 Q28.3 R95.1
DD_5V14: JP43.5 Q30.3 R102.1
GND: C1.2 C2.C C3.C C4.C C5.2 JP2.3 R5.1 U2.1 U2.12 U2.28 U2.29 U3.2
GND1: C6.2 C7.2 C8.C C9.C C10.C JP4.3 R12.1 U5.2 U6.1 U6.12 U6.28 U6.29
GND2: C11.2 C12.2 C13.C C14.C C15.C JP7.3 R19.1 U8.2 U9.1 U9.12 U9.28 U9.29
GND3: C16.2 C17.2 C18.C C19.C C20.C JP10.3 R26.1 U11.2 U12.1 U12.12 U12.28 U12.29
GND4: C21.2 C22.2 C23.C C24.C C25.C JP13.3 R33.1 U14.2 U15.1 U15.12 U15.28 U15.29
GND5: C26.2 C27.2 C28.C C29.C C30.C JP16.3 R40.1 U17.2 U18.1 U18.12 U18.28 U18.29
GND6: C31.2 C32.2 C33.C C34.C C35.C JP19.3 R47.1 U20.2 U21.1 U21.12 U21.28 U21.29
GND7: C36.2 C37.2 C38.C C39.C C40.C JP22.3 R54.1 U23.2 U24.1 U24.12 U24.28 U24.29
GND8: C41.2 C42.2 C43.C C44.C C45.C JP25.3 R61.1 U26.2 U27.1 U27.12 U27.28 U27.29
GND9: C46.2 C47.2 C48.C C49.C C50.C JP28.3 R68.1 U29.2 U30.1 U30.12 U30.28 U30.29
GND10: C51.2 C52.2 C53.C C54.C C55.C JP31.3 R75.1 U32.2 U33.1 U33.12 U33.28 U33.29
GND11: C56.2 C57.2 C58.C C59.C C60.C JP34.3 R82.1 U35.2 U36.1 U36.12 U36.28 U36.29
GND12: C61.2 C62.2 C63.C C64.C C65.C JP37.3 R89.1 U38.2 U39.1 U39.12 U39.28 U39.29
GND13: C66.2 C67.2 C68.C C69.C C70.C JP40.3 R96.1 U41.2 U42.1 U42.12 U42.28 U42.29
GND14: C71.2 C72.2 C73.C C74.C C75.C JP43.3 R103.1 U44.2 U45.1 U45.12 U45.28 U45.29
N$1: R12.2 R13.1 U4.1
N$2: R5.2 R6.1 U1.1
N$3: R19.2 R20.1 U7.1
N$4: R26.2 R27.1 U10.1
N$5: R33.2 R34.1 U13.1
N$6: R40.2 R41.1 U16.1
N$7: R47.2 R48.1 U19.1
N$8: R54.2 R55.1 U22.1
N$9: R61.2 R62.1 U25.1
N$10: R68.2 R69.1 U28.1
N$11: R75.2 R76.1 U31.1
N$12: R82.2 R83.1 U34.1
N$13: R89.2 R90.1 U37.1
N$14: R96.2 R97.1 U40.1
N$15: R103.2 R104.1 U43.1
RX: R7.1 U2.13
RX1: R14.1 U6.13
RX2: R21.1 U9.13
RX3: R28.1 U12.13
RX4: R35.1 U15.13
RX5: R42.1 U18.13
RX6: R49.1 U21.13
RX7: R56.1 U24.13
RX8: R63.1 U27.13
RX9: R70.1 U30.13
RX10: R77.1 U33.13
RX11: R84.1 U36.13
RX12: R91.1 U39.13
RX13: R98.1 U42.13
RX14: R105.1 U45.13
RX_5V: JP2.4 R7.2
RX_5V1: JP4.4 R14.2
RX_5V2: JP7.4 R21.2
RX_5V3: JP10.4 R28.2
RX_5V4: JP13.4 R35.2
RX_5V5: JP16.4 R42.2
RX_5V6: JP19.4 R49.2
RX_5V7: JP22.4 R56.2
RX_5V8: JP25.4 R63.2
RX_5V9: JP28.4 R70.2
RX_5V10: JP31.4 R77.2
RX_5V11: JP34.4 R84.2
RX_5V12: JP37.4 R91.2
RX_5V13: JP40.4 R98.2
RX_5V14: JP43.4 R105.2
TX: Q1.2 R1.1 U2.14
TX1: Q3.2 R8.1 U6.14
TX2: Q5.2 R15.1 U9.14
TX3: Q7.2 R22.1 U12.14
TX4: Q9.2 R29.1 U15.14
TX5: Q11.2 R36.1 U18.14
TX6: Q13.2 R43.1 U21.14
TX7: Q15.2 R50.1 U24.14
TX8: Q17.2 R57.1 U27.14
TX9: Q19.2 R64.1 U30.14
TX10: Q21.2 R71.1 U33.14
TX11: Q23.2 R78.1 U36.14
TX12: Q25.2 R85.1 U39.14
TX13: Q27.2 R92.1 U42.14
TX14: Q29.2 R99.1 U45.14
TX_5V: JP2.2 Q1.3 R2.1
TX_5V1: JP4.2 Q3.3 R9.1
TX_5V2: JP7.2 Q5.3 R16.1
TX_5V3: JP10.2 Q7.3 R23.1
TX_5V4: JP13.2 Q9.3 R30.1
TX_5V5: JP16.2 Q11.3 R37.1
TX_5V6: JP19.2 Q13.3 R44.1
TX_5V7: JP22.2 Q15.3 R51.1
TX_5V8: JP25.2 Q17.3 R58.1
TX_5V9: JP28.2 Q19.3 R65.1
TX_5V10: JP31.2 Q21.3 R72.1
TX_5V11: JP34.2 Q23.3 R79.1
TX_5V12: JP37.2 Q25.3 R86.1
TX_5V13: JP40.2 Q27.3 R93.1
TX_5V14: JP43.2 Q29.3 R100.1
VCC: C3.A C5.1 Q1.1 Q2.1 R1.2 R3.2 U2.11 U3.5
VCC1: C6.1 C9.A Q3.1 Q4.1 R8.2 R10.2 U5.5 U6.11
VCC2: C11.1 C14.A Q5.1 Q6.1 R15.2 R17.2 U8.5 U9.11
VCC3: C16.1 C19.A Q7.1 Q8.1 R22.2 R24.2 U11.5 U12.11
VCC4: C21.1 C24.A Q9.1 Q10.1 R29.2 R31.2 U14.5 U15.11
VCC5: C26.1 C29.A Q11.1 Q12.1 R36.2 R38.2 U17.5 U18.11
VCC6: C31.1 C34.A Q13.1 Q14.1 R43.2 R45.2 U20.5 U21.11
VCC7: C36.1 C39.A Q15.1 Q16.1 R50.2 R52.2 U23.5 U24.11
VCC8: C41.1 C44.A Q17.1 Q18.1 R57.2 R59.2 U26.5 U27.11
VCC9: C46.1 C49.A Q19.1 Q20.1 R64.2 R66.2 U29.5 U30.11
VCC10: C51.1 C54.A Q21.1 Q22.1 R71.2 R73.2 U32.5 U33.11
VCC11: C56.1 C59.A Q23.1 Q24.1 R78.2 R80.2 U35.5 U36.11
VCC12: C61.1 C64.A Q25.1 Q26.1 R85.2 R87.2 U38.5 U39.11
VCC13: C66.1 C69.A Q27.1 Q28.1 R92.2 R94.2 U41.5 U42.11
VCC14: C71.1 C74.A Q29.1 Q30.1 R99.2 R101.2 U44.5 U45.11

## Tracks (layer width: path | path; a pad name or v marks a point on that pad's centre or on a via)
5V
  Top 0.254: 17.44,15.49 C1.1 | 17.44,15.49 17.44,17.6 U3.1 17.46,16.51 19.38,16.51 19.38,17.62 U3.3 | 17.44,15.49 12.83,15.49 11.43,14.1 11.43,7.24 11.81,6.86 12.06,6.6 12.12,6.55 14.92,6.55 | C2.A 29.37,8.6 R2.2 25.91,7.53 25.91,5.71 25.27,5.08 22.61,5.08 21.84,5.84 21.84,7.37 20.83,8.38 20.19,8.38 19.49,7.68 U1.2 16.09,7.68 15.93,7.52 R4.2 14.92,6.55 | 14.92,6.55 R6.2
5V1
  Top 0.254: 68.24,15.49 C7.1 | 68.24,15.49 68.24,17.6 U5.1 68.27,16.51 70.18,16.51 70.18,17.62 U5.3 | 68.24,15.49 63.63,15.49 62.23,14.1 62.23,7.24 62.61,6.86 62.87,6.6 62.92,6.55 65.72,6.55 | C8.A 80.17,8.6 R9.2 76.71,7.53 76.71,5.71 76.07,5.08 73.41,5.08 72.64,5.84 72.64,7.37 71.63,8.38 70.99,8.38 70.29,7.68 U4.2 66.89,7.68 66.73,7.52 R11.2 65.72,6.55 | 65.72,6.55 R13.2
5V2
  Top 0.254: 119.04,15.49 C12.1 | 119.04,15.49 119.04,17.6 U8.1 119.07,16.51 120.98,16.51 120.98,17.62 U8.3 | 119.04,15.49 114.43,15.49 113.03,14.1 113.03,7.24 113.41,6.86 113.67,6.6 113.72,6.55 116.52,6.55 | C13.A 130.97,8.6 R16.2 127.51,7.53 127.51,5.71 126.87,5.08 124.21,5.08 123.44,5.84 123.44,7.37 122.43,8.38 121.79,8.38 121.09,7.68 U7.2 117.69,7.68 117.53,7.52 R18.2 116.52,6.55 | 116.52,6.55 R20.2
5V3
  Top 0.254: 17.44,38.61 C17.1 | 17.44,38.61 17.44,40.71 U11.1 17.46,39.62 19.38,39.62 19.38,40.74 U11.3 | 17.44,38.61 12.83,38.61 11.43,37.21 11.43,30.35 11.81,29.97 12.06,29.72 12.12,29.67 14.92,29.67 | C18.A 29.37,31.71 R23.2 25.91,30.64 25.91,28.83 25.27,28.19 22.61,28.19 21.84,28.96 21.84,30.48 20.83,31.5 20.19,31.5 19.49,30.79 U10.2 16.09,30.79 15.93,30.63 R25.2 14.92,29.67 | 14.92,29.67 R27.2
5V4
  Top 0.254: 68.24,38.61 C22.1 | 68.24,38.61 68.24,40.71 U14.1 68.27,39.62 70.18,39.62 70.18,40.74 U14.3 | 68.24,38.61 63.63,38.61 62.23,37.21 62.23,30.35 62.61,29.97 62.87,29.72 62.92,29.67 65.72,29.67 | C23.A 80.17,31.71 R30.2 76.71,30.64 76.71,28.83 76.07,28.19 73.41,28.19 72.64,28.96 72.64,30.48 71.63,31.5 70.99,31.5 70.29,30.79 U13.2 66.89,30.79 66.73,30.63 R32.2 65.72,29.67 | 65.72,29.67 R34.2
5V5
  Top 0.254: 119.04,38.61 C27.1 | 119.04,38.61 119.04,40.71 U17.1 119.07,39.62 120.98,39.62 120.98,40.74 U17.3 | 119.04,38.61 114.43,38.61 113.03,37.21 113.03,30.35 113.41,29.97 113.67,29.72 113.72,29.67 116.52,29.67 | C28.A 130.97,31.71 R37.2 127.51,30.64 127.51,28.83 126.87,28.19 124.21,28.19 123.44,28.96 123.44,30.48 122.43,31.5 121.79,31.5 121.09,30.79 U16.2 117.69,30.79 117.53,30.63 R39.2 116.52,29.67 | 116.52,29.67 R41.2
5V6
  Top 0.254: 17.44,61.72 C32.1 | 17.44,61.72 17.44,63.82 U20.1 17.46,62.74 19.38,62.74 19.38,63.85 U20.3 | 17.44,61.72 12.83,61.72 11.43,60.32 11.43,53.47 11.81,53.09 12.06,52.83 12.12,52.78 14.92,52.78 | C33.A 29.37,54.82 R44.2 25.91,53.76 25.91,51.94 25.27,51.31 22.61,51.31 21.84,52.07 21.84,53.59 20.83,54.61 20.19,54.61 19.49,53.91 U19.2 16.09,53.91 15.93,53.75 R46.2 14.92,52.78 | 14.92,52.78 R48.2
5V7
  Top 0.254: 68.24,61.72 C37.1 | 68.24,61.72 68.24,63.82 U23.1 68.27,62.74 70.18,62.74 70.18,63.85 U23.3 | 68.24,61.72 63.63,61.72 62.23,60.32 62.23,53.47 62.61,53.09 62.87,52.83 62.92,52.78 65.72,52.78 | C38.A 80.17,54.82 R51.2 76.71,53.76 76.71,51.94 76.07,51.31 73.41,51.31 72.64,52.07 72.64,53.59 71.63,54.61 70.99,54.61 70.29,53.91 U22.2 66.89,53.91 66.73,53.75 R53.2 65.72,52.78 | 65.72,52.78 R55.2
5V8
  Top 0.254: 119.04,61.72 C42.1 | 119.04,61.72 119.04,63.82 U26.1 119.07,62.74 120.98,62.74 120.98,63.85 U26.3 | 119.04,61.72 114.43,61.72 113.03,60.32 113.03,53.47 113.41,53.09 113.67,52.83 113.72,52.78 116.52,52.78 | C43.A 130.97,54.82 R58.2 127.51,53.76 127.51,51.94 126.87,51.31 124.21,51.31 123.44,52.07 123.44,53.59 122.43,54.61 121.79,54.61 121.09,53.91 U25.2 117.69,53.91 117.53,53.75 R60.2 116.52,52.78 | 116.52,52.78 R62.2
5V9
  Top 0.254: 17.44,84.84 C47.1 | 17.44,84.84 17.44,86.94 U29.1 17.46,85.85 19.38,85.85 19.38,86.97 U29.3 | 17.44,84.84 12.83,84.84 11.43,83.44 11.43,76.58 11.81,76.2 12.06,75.95 12.12,75.89 14.92,75.89 | C48.A 29.37,77.94 R65.2 25.91,76.87 25.91,75.06 25.27,74.42 22.61,74.42 21.84,75.18 21.84,76.71 20.83,77.72 20.19,77.72 19.49,77.02 U28.2 16.09,77.02 15.93,76.86 R67.2 14.92,75.89 | 14.92,75.89 R69.2
5V10
  Top 0.254: 68.24,84.84 C52.1 | 68.24,84.84 68.24,86.94 U32.1 68.27,85.85 70.18,85.85 70.18,86.97 U32.3 | 68.24,84.84 63.63,84.84 62.23,83.44 62.23,76.58 62.61,76.2 62.87,75.95 62.92,75.89 65.72,75.89 | C53.A 80.17,77.94 R72.2 76.71,76.87 76.71,75.06 76.07,74.42 73.41,74.42 72.64,75.18 72.64,76.71 71.63,77.72 70.99,77.72 70.29,77.02 U31.2 66.89,77.02 66.73,76.86 R74.2 65.72,75.89 | 65.72,75.89 R76.2
5V11
  Top 0.254: 119.04,84.84 C57.1 | 119.04,84.84 119.04,86.94 U35.1 119.07,85.85 120.98,85.85 120.98,86.97 U35.3 | 119.04,84.84 114.43,84.84 113.03,83.44 113.03,76.58 113.41,76.2 113.67,75.95 113.72,75.89 116.52,75.89 | C58.A 130.97,77.94 R79.2 127.51,76.87 127.51,75.06 126.87,74.42 124.21,74.42 123.44,75.18 123.44,76.71 122.43,77.72 121.79,77.72 121.09,77.02 U34.2 117.69,77.02 117.53,76.86 R81.2 116.52,75.89 | 116.52,75.89 R83.2
5V12
  Top 0.254: 17.44,107.95 C62.1 | 17.44,107.95 17.44,110.05 U38.1 17.46,108.97 19.38,108.97 19.38,110.08 U38.3 | 17.44,107.95 12.83,107.95 11.43,106.55 11.43,99.69 11.81,99.31 12.06,99.06 12.12,99.01 14.92,99.01 | C63.A 29.37,101.05 R86.2 25.91,99.99 25.91,98.17 25.27,97.54 22.61,97.54 21.84,98.3 21.84,99.82 20.83,100.84 20.19,100.84 19.49,100.13 U37.2 16.09,100.13 15.93,99.97 R88.2 14.92,99.01 | 14.92,99.01 R90.2
5V13
  Top 0.254: 68.24,107.95 C67.1 | 68.24,107.95 68.24,110.05 U41.1 68.27,108.97 70.18,108.97 70.18,110.08 U41.3 | 68.24,107.95 63.63,107.95 62.23,106.55 62.23,99.69 62.61,99.31 62.87,99.06 62.92,99.01 65.72,99.01 | C68.A 80.17,101.05 R93.2 76.71,99.99 76.71,98.17 76.07,97.54 73.41,97.54 72.64,98.3 72.64,99.82 71.63,100.84 70.99,100.84 70.29,100.13 U40.2 66.89,100.13 66.73,99.97 R95.2 65.72,99.01 | 65.72,99.01 R97.2
5V14
  Top 0.254: 119.04,107.95 C72.1 | 119.04,107.95 119.04,110.05 U44.1 119.07,108.97 120.98,108.97 120.98,110.08 U44.3 | 119.04,107.95 114.43,107.95 113.03,106.55 113.03,99.69 113.41,99.31 113.67,99.06 113.72,99.01 116.52,99.01 | C73.A 130.97,101.05 R100.2 127.51,99.99 127.51,98.17 126.87,97.54 124.21,97.54 123.44,98.3 123.44,99.82 122.43,100.84 121.79,100.84 121.09,100.13 U43.2 117.69,100.13 117.53,99.97 R102.2 116.52,99.01 | 116.52,99.01 R104.2
15V  (via drill 0.51)
  Top 0.406: JP2.1 12.86,21.88 v11.68,20.7 | U1.3 18.96,5.37 v20.57,6.98 | v5.71,5.84 4.19,5.84 C4.A
  Bottom 0.406: 11.81,6.98 10.03,6.98 8.89,5.84 v5.71,5.84 | 11.81,6.98 v20.57,6.98 | v11.68,20.7 11.68,17.91 10.79,17.02 10.79,12.7 11.68,11.81 11.68,7.11 11.81,6.98
15V1  (via drill 0.51)
  Top 0.406: JP4.1 63.66,21.88 v62.48,20.7 | U4.3 69.76,5.37 v71.37,6.98 | v56.52,5.84 54.99,5.84 C10.A
  Bottom 0.406: 62.61,6.98 60.83,6.98 59.69,5.84 v56.52,5.84 | 62.61,6.98 v71.37,6.98 | v62.48,20.7 62.48,17.91 61.59,17.02 61.59,12.7 62.48,11.81 62.48,7.11 62.61,6.98
15V2  (via drill 0.51)
  Top 0.406: JP7.1 114.46,21.88 v113.28,20.7 | U7.3 120.56,5.37 v122.17,6.98 | v107.32,5.84 105.79,5.84 C15.A
  Bottom 0.406: 113.41,6.98 111.63,6.98 110.49,5.84 v107.32,5.84 | 113.41,6.98 v122.17,6.98 | v113.28,20.7 113.28,17.91 112.4,17.02 112.4,12.7 113.28,11.81 113.28,7.11 113.41,6.98
15V3  (via drill 0.51)
  Top 0.406: JP10.1 12.86,44.99 v11.68,43.81 | U10.3 18.96,28.48 v20.57,30.1 | v5.71,28.96 4.19,28.96 C20.A
  Bottom 0.406: 11.81,30.1 10.03,30.1 8.89,28.96 v5.71,28.96 | 11.81,30.1 v20.57,30.1 | v11.68,43.81 11.68,41.02 10.79,40.13 10.79,35.81 11.68,34.92 11.68,30.23 11.81,30.1
15V4  (via drill 0.51)
  Top 0.406: JP13.1 63.66,44.99 v62.48,43.81 | U13.3 69.76,28.48 v71.37,30.1 | v56.52,28.96 54.99,28.96 C25.A
  Bottom 0.406: 62.61,30.1 60.83,30.1 59.69,28.96 v56.52,28.96 | 62.61,30.1 v71.37,30.1 | v62.48,43.81 62.48,41.02 61.59,40.13 61.59,35.81 62.48,34.92 62.48,30.23 62.61,30.1
15V5  (via drill 0.51)
  Top 0.406: JP16.1 114.46,44.99 v113.28,43.81 | U16.3 120.56,28.48 v122.17,30.1 | v107.32,28.96 105.79,28.96 C30.A
  Bottom 0.406: 113.41,30.1 111.63,30.1 110.49,28.96 v107.32,28.96 | 113.41,30.1 v122.17,30.1 | v113.28,43.81 113.28,41.02 112.4,40.13 112.4,35.81 113.28,34.92 113.28,30.23 113.41,30.1
15V6  (via drill 0.51)
  Top 0.406: JP19.1 12.86,68.11 v11.68,66.93 | U19.3 18.96,51.59 v20.57,53.21 | v5.71,52.07 4.19,52.07 C35.A
  Bottom 0.406: 11.81,53.21 10.03,53.21 8.89,52.07 v5.71,52.07 | 11.81,53.21 v20.57,53.21 | v11.68,66.93 11.68,64.14 10.79,63.25 10.79,58.93 11.68,58.04 11.68,53.34 11.81,53.21
15V7  (via drill 0.51)
  Top 0.406: JP22.1 63.66,68.11 v62.48,66.93 | U22.3 69.76,51.59 v71.37,53.21 | v56.52,52.07 54.99,52.07 C40.A
  Bottom 0.406: 62.61,53.21 60.83,53.21 59.69,52.07 v56.52,52.07 | 62.61,53.21 v71.37,53.21 | v62.48,66.93 62.48,64.14 61.59,63.25 61.59,58.93 62.48,58.04 62.48,53.34 62.61,53.21
15V8  (via drill 0.51)
  Top 0.406: JP25.1 114.46,68.11 v113.28,66.93 | U25.3 120.56,51.59 v122.17,53.21 | v107.32,52.07 105.79,52.07 C45.A
  Bottom 0.406: 113.41,53.21 111.63,53.21 110.49,52.07 v107.32,52.07 | 113.41,53.21 v122.17,53.21 | v113.28,66.93 113.28,64.14 112.4,63.25 112.4,58.93 113.28,58.04 113.28,53.34 113.41,53.21
15V9  (via drill 0.51)
  Top 0.406: JP28.1 12.86,91.22 v11.68,90.04 | U28.3 18.96,74.71 v20.57,76.33 | v5.71,75.18 4.19,75.18 C50.A
  Bottom 0.406: 11.81,76.33 10.03,76.33 8.89,75.18 v5.71,75.18 | 11.81,76.33 v20.57,76.33 | v11.68,90.04 11.68,87.25 10.79,86.36 10.79,82.04 11.68,81.15 11.68,76.45 11.81,76.33
15V10  (via drill 0.51)
  Top 0.406: JP31.1 63.66,91.22 v62.48,90.04 | U31.3 69.76,74.71 v71.37,76.33 | v56.52,75.18 54.99,75.18 C55.A
  Bottom 0.406: 62.61,76.33 60.83,76.33 59.69,75.18 v56.52,75.18 | 62.61,76.33 v71.37,76.33 | v62.48,90.04 62.48,87.25 61.59,86.36 61.59,82.04 62.48,81.15 62.48,76.45 62.61,76.33
15V11  (via drill 0.51)
  Top 0.406: JP34.1 114.46,91.22 v113.28,90.04 | U34.3 120.56,74.71 v122.17,76.33 | v107.32,75.18 105.79,75.18 C60.A
  Bottom 0.406: 113.41,76.33 111.63,76.33 110.49,75.18 v107.32,75.18 | 113.41,76.33 v122.17,76.33 | v113.28,90.04 113.28,87.25 112.4,86.36 112.4,82.04 113.28,81.15 113.28,76.45 113.41,76.33
15V12  (via drill 0.51)
  Top 0.406: JP37.1 12.86,114.34 v11.68,113.16 | U37.3 18.96,97.82 v20.57,99.44 | v5.71,98.3 4.19,98.3 C65.A
  Bottom 0.406: 11.81,99.44 10.03,99.44 8.89,98.3 v5.71,98.3 | 11.81,99.44 v20.57,99.44 | v11.68,113.16 11.68,110.36 10.79,109.47 10.79,105.16 11.68,104.27 11.68,99.57 11.81,99.44
15V13  (via drill 0.51)
  Top 0.406: JP40.1 63.66,114.34 v62.48,113.16 | U40.3 69.76,97.82 v71.37,99.44 | v56.52,98.3 54.99,98.3 C70.A
  Bottom 0.406: 62.61,99.44 60.83,99.44 59.69,98.3 v56.52,98.3 | 62.61,99.44 v71.37,99.44 | v62.48,113.16 62.48,110.36 61.59,109.47 61.59,105.16 62.48,104.27 62.48,99.57 62.61,99.44
15V14  (via drill 0.51)
  Top 0.406: JP43.1 114.46,114.34 v113.28,113.16 | U43.3 120.56,97.82 v122.17,99.44 | v107.32,98.3 105.79,98.3 C75.A
  Bottom 0.406: 113.41,99.44 111.63,99.44 110.49,98.3 v107.32,98.3 | 113.41,99.44 v122.17,99.44 | v113.28,113.16 113.28,110.36 112.4,109.47 112.4,105.16 113.28,104.27 113.28,99.57 113.41,99.44
DD  (via drill 0.51)
  Top 0.254: v19.41,13.95 19.24,13.78 Q2.2 19.38,11.94 21.97,11.94 24.51,14.48 27.05,14.48 33.35,20.78 U2.4 | v15.54,25.4 14.18,25.4 R3.1
  Bottom 0.254: v19.41,13.95 15.04,13.95 14.35,14.63 14.35,19.18 15.34,20.17 15.34,21.44 14.58,22.2 12.09,22.2 11.05,23.24 11.05,24.99 12.04,25.98 14.96,25.98 v15.54,25.4
DD1  (via drill 0.51)
  Top 0.254: v70.21,13.95 70.04,13.78 Q4.2 70.18,11.94 72.77,11.94 75.31,14.48 77.85,14.48 84.15,20.78 U6.4 | v66.34,25.4 64.98,25.4 R10.1
  Bottom 0.254: v70.21,13.95 65.84,13.95 65.15,14.63 65.15,19.18 66.14,20.17 66.14,21.44 65.38,22.2 62.89,22.2 61.85,23.24 61.85,24.99 62.84,25.98 65.76,25.98 v66.34,25.4
DD2  (via drill 0.51)
  Top 0.254: v121.01,13.95 120.84,13.78 Q6.2 120.98,11.94 123.57,11.94 126.11,14.48 128.65,14.48 134.95,20.78 U9.4 | v117.15,25.4 115.79,25.4 R17.1
  Bottom 0.254: v121.01,13.95 116.64,13.95 115.95,14.63 115.95,19.18 116.94,20.17 116.94,21.44 116.18,22.2 113.69,22.2 112.65,23.24 112.65,24.99 113.64,25.98 116.56,25.98 v117.15,25.4
DD3  (via drill 0.51)
  Top 0.254: v19.41,37.06 19.24,36.89 Q8.2 19.38,35.05 21.97,35.05 24.51,37.59 27.05,37.59 33.35,43.89 U12.4 | v15.54,48.51 14.18,48.51 R24.1
  Bottom 0.254: v19.41,37.06 15.04,37.06 14.35,37.74 14.35,42.29 15.34,43.28 15.34,44.55 14.58,45.31 12.09,45.31 11.05,46.35 11.05,48.11 12.04,49.1 14.96,49.1 v15.54,48.51
DD4  (via drill 0.51)
  Top 0.254: v70.21,37.06 70.04,36.89 Q10.2 70.18,35.05 72.77,35.05 75.31,37.59 77.85,37.59 84.15,43.89 U15.4 | v66.34,48.51 64.98,48.51 R31.1
  Bottom 0.254: v70.21,37.06 65.84,37.06 65.15,37.74 65.15,42.29 66.14,43.28 66.14,44.55 65.38,45.31 62.89,45.31 61.85,46.35 61.85,48.11 62.84,49.1 65.76,49.1 v66.34,48.51
DD5  (via drill 0.51)
  Top 0.254: v121.01,37.06 120.84,36.89 Q12.2 120.98,35.05 123.57,35.05 126.11,37.59 128.65,37.59 134.95,43.89 U18.4 | v117.15,48.51 115.79,48.51 R38.1
  Bottom 0.254: v121.01,37.06 116.64,37.06 115.95,37.74 115.95,42.29 116.94,43.28 116.94,44.55 116.18,45.31 113.69,45.31 112.65,46.35 112.65,48.11 113.64,49.1 116.56,49.1 v117.15,48.51
DD6  (via drill 0.51)
  Top 0.254: v19.41,60.17 19.24,60 Q14.2 19.38,58.17 21.97,58.17 24.51,60.71 27.05,60.71 33.35,67.01 U21.4 | v15.54,71.63 14.18,71.63 R45.1
  Bottom 0.254: v19.41,60.17 15.04,60.17 14.35,60.86 14.35,65.41 15.34,66.4 15.34,67.67 14.58,68.43 12.09,68.43 11.05,69.47 11.05,71.22 12.04,72.21 14.96,72.21 v15.54,71.63
DD7  (via drill 0.51)
  Top 0.254: v70.21,60.17 70.04,60 Q16.2 70.18,58.17 72.77,58.17 75.31,60.71 77.85,60.71 84.15,67.01 U24.4 | v66.34,71.63 64.98,71.63 R52.1
  Bottom 0.254: v70.21,60.17 65.84,60.17 65.15,60.86 65.15,65.41 66.14,66.4 66.14,67.67 65.38,68.43 62.89,68.43 61.85,69.47 61.85,71.22 62.84,72.21 65.76,72.21 v66.34,71.63
DD8  (via drill 0.51)
  Top 0.254: v121.01,60.17 120.84,60 Q18.2 120.98,58.17 123.57,58.17 126.11,60.71 128.65,60.71 134.95,67.01 U27.4 | v117.15,71.63 115.79,71.63 R59.1
  Bottom 0.254: v121.01,60.17 116.64,60.17 115.95,60.86 115.95,65.41 116.94,66.4 116.94,67.67 116.18,68.43 113.69,68.43 112.65,69.47 112.65,71.22 113.64,72.21 116.56,72.21 v117.15,71.63
DD9  (via drill 0.51)
  Top 0.254: v19.41,83.29 19.24,83.12 Q20.2 19.38,81.28 21.97,81.28 24.51,83.82 27.05,83.82 33.35,90.12 U30.4 | v15.54,94.74 14.18,94.74 R66.1
  Bottom 0.254: v19.41,83.29 15.04,83.29 14.35,83.97 14.35,88.52 15.34,89.51 15.34,90.78 14.58,91.54 12.09,91.54 11.05,92.58 11.05,94.34 12.04,95.33 14.96,95.33 v15.54,94.74
DD10  (via drill 0.51)
  Top 0.254: v70.21,83.29 70.04,83.12 Q22.2 70.18,81.28 72.77,81.28 75.31,83.82 77.85,83.82 84.15,90.12 U33.4 | v66.34,94.74 64.98,94.74 R73.1
  Bottom 0.254: v70.21,83.29 65.84,83.29 65.15,83.97 65.15,88.52 66.14,89.51 66.14,90.78 65.38,91.54 62.89,91.54 61.85,92.58 61.85,94.34 62.84,95.33 65.76,95.33 v66.34,94.74
DD11  (via drill 0.51)
  Top 0.254: v121.01,83.29 120.84,83.12 Q24.2 120.98,81.28 123.57,81.28 126.11,83.82 128.65,83.82 134.95,90.12 U36.4 | v117.15,94.74 115.79,94.74 R80.1
  Bottom 0.254: v121.01,83.29 116.64,83.29 115.95,83.97 115.95,88.52 116.94,89.51 116.94,90.78 116.18,91.54 113.69,91.54 112.65,92.58 112.65,94.34 113.64,95.33 116.56,95.33 v117.15,94.74
DD12  (via drill 0.51)
  Top 0.254: v19.41,106.4 19.24,106.23 Q26.2 19.38,104.39 21.97,104.39 24.51,106.93 27.05,106.93 33.35,113.24 U39.4 | v15.54,117.86 14.18,117.86 R87.1
  Bottom 0.254: v19.41,106.4 15.04,106.4 14.35,107.09 14.35,111.63 15.34,112.62 15.34,113.89 14.58,114.66 12.09,114.66 11.05,115.7 11.05,117.45 12.04,118.44 14.96,118.44 v15.54,117.86
DD13  (via drill 0.51)
  Top 0.254: v70.21,106.4 70.04,106.23 Q28.2 70.18,104.39 72.77,104.39 75.31,106.93 77.85,106.93 84.15,113.24 U42.4 | v66.34,117.86 64.98,117.86 R94.1
  Bottom 0.254: v70.21,106.4 65.84,106.4 65.15,107.09 65.15,111.63 66.14,112.62 66.14,113.89 65.38,114.66 62.89,114.66 61.85,115.7 61.85,117.45 62.84,118.44 65.76,118.44 v66.34,117.86
DD14  (via drill 0.51)
  Top 0.254: v121.01,106.4 120.84,106.23 Q30.2 120.98,104.39 123.57,104.39 126.11,106.93 128.65,106.93 134.95,113.24 U45.4 | v117.15,117.86 115.79,117.86 R101.1
  Bottom 0.254: v121.01,106.4 116.64,106.4 115.95,107.09 115.95,111.63 116.94,112.62 116.94,113.89 116.18,114.66 113.69,114.66 112.65,115.7 112.65,117.45 113.64,118.44 116.56,118.44 v117.15,117.86
DD_5V
  Top 0.254: 15.35,11.72 JP2.5 14.79,11.68 13.21,11.68 12.88,11.35 12.88,7.86 R4.1 | 15.35,11.72 15.35,12.69 15.65,12.98 16.43,12.98 16.87,13.41 16.87,13.77 17.28,14.18 Q2.3 | 15.35,11.72 15.73,11.34 | 15.35,11.72 15.34,11.71
DD_5V1
  Top 0.254: 66.15,11.72 JP4.5 65.59,11.68 64.01,11.68 63.68,11.35 63.68,7.86 R11.1 | 66.15,11.72 66.15,12.69 66.45,12.98 67.23,12.98 67.67,13.41 67.67,13.77 68.08,14.18 Q4.3 | 66.15,11.72 66.53,11.34 | 66.15,11.72 66.14,11.71
DD_5V2
  Top 0.254: 116.95,11.72 JP7.5 116.39,11.68 114.81,11.68 114.48,11.35 114.48,7.86 R18.1 | 116.95,11.72 116.95,12.69 117.25,12.98 118.03,12.98 118.47,13.41 118.47,13.77 118.88,14.18 Q6.3 | 116.95,11.72 117.33,11.34 | 116.95,11.72 116.94,11.71
DD_5V3
  Top 0.254: 15.35,34.83 JP10.5 14.79,34.8 13.21,34.8 12.88,34.47 12.88,30.98 R25.1 | 15.35,34.83 15.35,35.8 15.65,36.09 16.43,36.09 16.87,36.52 16.87,36.88 17.28,37.29 Q8.3 | 15.35,34.83 15.73,34.45 | 15.35,34.83 15.34,34.82
DD_5V4
  Top 0.254: 66.15,34.83 JP13.5 65.59,34.8 64.01,34.8 63.68,34.47 63.68,30.98 R32.1 | 66.15,34.83 66.15,35.8 66.45,36.09 67.23,36.09 67.67,36.52 67.67,36.88 68.08,37.29 Q10.3 | 66.15,34.83 66.53,34.45 | 66.15,34.83 66.14,34.82
DD_5V5
  Top 0.254: 116.95,34.83 JP16.5 116.39,34.8 114.81,34.8 114.48,34.47 114.48,30.98 R39.1 | 116.95,34.83 116.95,35.8 117.25,36.09 118.03,36.09 118.47,36.52 118.47,36.88 118.88,37.29 Q12.3 | 116.95,34.83 117.33,34.45 | 116.95,34.83 116.94,34.82
DD_5V6
  Top 0.254: 15.35,57.95 JP19.5 14.79,57.91 13.21,57.91 12.88,57.58 12.88,54.09 R46.1 | 15.35,57.95 15.35,58.91 15.65,59.21 16.43,59.21 16.87,59.64 16.87,59.99 17.28,60.41 Q14.3 | 15.35,57.95 15.73,57.57 | 15.35,57.95 15.34,57.94
DD_5V7
  Top 0.254: 66.15,57.95 JP22.5 65.59,57.91 64.01,57.91 63.68,57.58 63.68,54.09 R53.1 | 66.15,57.95 66.15,58.91 66.45,59.21 67.23,59.21 67.67,59.64 67.67,59.99 68.08,60.41 Q16.3 | 66.15,57.95 66.53,57.57 | 66.15,57.95 66.14,57.94
DD_5V8
  Top 0.254: 116.95,57.95 JP25.5 116.39,57.91 114.81,57.91 114.48,57.58 114.48,54.09 R60.1 | 116.95,57.95 116.95,58.91 117.25,59.21 118.03,59.21 118.47,59.64 118.47,59.99 118.88,60.41 Q18.3 | 116.95,57.95 117.33,57.57 | 116.95,57.95 116.94,57.94
DD_5V9
  Top 0.254: 15.35,81.06 JP28.5 14.79,81.03 13.21,81.03 12.88,80.7 12.88,77.2 R67.1 | 15.35,81.06 15.35,82.03 15.65,82.32 16.43,82.32 16.87,82.75 16.87,83.11 17.28,83.52 Q20.3 | 15.35,81.06 15.73,80.68 | 15.35,81.06 15.34,81.05
DD_5V10
  Top 0.254: 66.15,81.06 JP31.5 65.59,81.03 64.01,81.03 63.68,80.7 63.68,77.2 R74.1 | 66.15,81.06 66.15,82.03 66.45,82.32 67.23,82.32 67.67,82.75 67.67,83.11 68.08,83.52 Q22.3 | 66.15,81.06 66.53,80.68 | 66.15,81.06 66.14,81.05
DD_5V11
  Top 0.254: 116.95,81.06 JP34.5 116.39,81.03 114.81,81.03 114.48,80.7 114.48,77.2 R81.1 | 116.95,81.06 116.95,82.03 117.25,82.32 118.03,82.32 118.47,82.75 118.47,83.11 118.88,83.52 Q24.3 | 116.95,81.06 117.33,80.68 | 116.95,81.06 116.94,81.05
DD_5V12
  Top 0.254: 15.35,104.18 JP37.5 14.79,104.14 13.21,104.14 12.88,103.81 12.88,100.32 R88.1 | 15.35,104.18 15.35,105.14 15.65,105.44 16.43,105.44 16.87,105.87 16.87,106.22 17.28,106.64 Q26.3 | 15.35,104.18 15.73,103.8 | 15.35,104.18 15.34,104.16
DD_5V13
  Top 0.254: 66.15,104.18 JP40.5 65.59,104.14 64.01,104.14 63.68,103.81 63.68,100.32 R95.1 | 66.15,104.18 66.15,105.14 66.45,105.44 67.23,105.44 67.67,105.87 67.67,106.22 68.08,106.64 Q28.3 | 66.15,104.18 66.53,103.8 | 66.15,104.18 66.14,104.16
DD_5V14
  Top 0.254: 116.95,104.18 JP43.5 116.39,104.14 114.81,104.14 114.48,103.81 114.48,100.32 R102.1 | 116.95,104.18 116.95,105.14 117.25,105.44 118.03,105.44 118.47,105.87 118.47,106.22 118.88,106.64 Q30.3 | 116.95,104.18 117.33,103.8 | 116.95,104.18 116.94,104.16
GND  (via drill 0.51)
  Top 0.254: U2.28 19.85,14.81 C1.2
  other vias: 2.67,5.97 4.95,14.86 21.21,24.38 34.29,8.79 23.75,21.84 18.41,19.08
  pour Top (isolate 0.305): 0,4.32 0,26.92 41.15,26.92 41.15,12.83 37.85,12.83 37.85,8 41.15,8 41.15,4.32
  pour Bottom (isolate 0.305): 0,26.92 0,4.32 35.94,4.32 35.94,26.92
GND1  (via drill 0.51)
  Top 0.254: U6.28 70.65,14.81 C7.2
  other vias: 53.47,5.97 55.75,14.86 72.01,24.38 85.09,8.79 74.55,21.84 69.22,19.08
  pour Top (isolate 0.305): 50.8,4.32 50.8,26.92 91.95,26.92 91.95,12.83 88.65,12.83 88.65,8 91.95,8 91.95,4.32
  pour Bottom (isolate 0.305): 50.8,26.92 50.8,4.32 86.74,4.32 86.74,26.92
GND2  (via drill 0.51)
  Top 0.254: U9.28 121.45,14.81 C12.2
  other vias: 104.27,5.97 106.55,14.86 122.81,24.38 135.89,8.79 125.35,21.84 120.02,19.08
  pour Top (isolate 0.305): 101.6,4.32 101.6,26.92 142.75,26.92 142.75,12.83 139.45,12.83 139.45,8 142.75,8 142.75,4.32
  pour Bottom (isolate 0.305): 101.6,26.92 101.6,4.32 137.54,4.32 137.54,26.92
GND3  (via drill 0.51)
  Top 0.254: U12.28 19.85,37.92 C17.2
  other vias: 2.67,29.08 4.95,37.97 21.21,47.5 34.29,31.9 23.75,44.96 18.41,42.19
  pour Top (isolate 0.305): 0,27.43 0,50.04 41.15,50.04 41.15,35.94 37.85,35.94 37.85,31.12 41.15,31.12 41.15,27.43
  pour Bottom (isolate 0.305): 0,50.04 0,27.43 35.94,27.43 35.94,50.04
GND4  (via drill 0.51)
  Top 0.254: U15.28 70.65,37.92 C22.2
  other vias: 53.47,29.08 55.75,37.97 72.01,47.5 85.09,31.9 74.55,44.96 69.22,42.19
  pour Top (isolate 0.305): 50.8,27.43 50.8,50.04 91.95,50.04 91.95,35.94 88.65,35.94 88.65,31.12 91.95,31.12 91.95,27.43
  pour Bottom (isolate 0.305): 50.8,50.04 50.8,27.43 86.74,27.43 86.74,50.04
GND5  (via drill 0.51)
  Top 0.254: U18.28 121.45,37.92 C27.2
  other vias: 104.27,29.08 106.55,37.97 122.81,47.5 135.89,31.9 125.35,44.96 120.02,42.19
  pour Top (isolate 0.305): 101.6,27.43 101.6,50.04 142.75,50.04 142.75,35.94 139.45,35.94 139.45,31.12 142.75,31.12 142.75,27.43
  pour Bottom (isolate 0.305): 101.6,50.04 101.6,27.43 137.54,27.43 137.54,50.04
GND6  (via drill 0.51)
  Top 0.254: U21.28 19.85,61.03 C32.2
  other vias: 2.67,52.2 4.95,61.09 21.21,70.61 34.29,55.02 23.75,68.07 18.41,65.3
  pour Top (isolate 0.305): 0,50.55 0,73.15 41.15,73.15 41.15,59.05 37.85,59.05 37.85,54.23 41.15,54.23 41.15,50.55
  pour Bottom (isolate 0.305): 0,73.15 0,50.55 35.94,50.55 35.94,73.15
GND7  (via drill 0.51)
  Top 0.254: U24.28 70.65,61.03 C37.2
  other vias: 53.47,52.2 55.75,61.09 72.01,70.61 85.09,55.02 74.55,68.07 69.22,65.3
  pour Top (isolate 0.305): 50.8,50.55 50.8,73.15 91.95,73.15 91.95,59.05 88.65,59.05 88.65,54.23 91.95,54.23 91.95,50.55
  pour Bottom (isolate 0.305): 50.8,73.15 50.8,50.55 86.74,50.55 86.74,73.15
GND8  (via drill 0.51)
  Top 0.254: U27.28 121.45,61.03 C42.2
  other vias: 104.27,52.2 106.55,61.09 122.81,70.61 135.89,55.02 125.35,68.07 120.02,65.3
  pour Top (isolate 0.305): 101.6,50.55 101.6,73.15 142.75,73.15 142.75,59.05 139.45,59.05 139.45,54.23 142.75,54.23 142.75,50.55
  pour Bottom (isolate 0.305): 101.6,73.15 101.6,50.55 137.54,50.55 137.54,73.15
GND9  (via drill 0.51)
  Top 0.254: U30.28 19.85,84.15 C47.2
  other vias: 2.67,75.31 4.95,84.2 21.21,93.73 34.29,78.13 23.75,91.19 18.41,88.42
  pour Top (isolate 0.305): 0,73.66 0,96.27 41.15,96.27 41.15,82.17 37.85,82.17 37.85,77.34 41.15,77.34 41.15,73.66
  pour Bottom (isolate 0.305): 0,96.27 0,73.66 35.94,73.66 35.94,96.27
GND10  (via drill 0.51)
  Top 0.254: U33.28 70.65,84.15 C52.2
  other vias: 53.47,75.31 55.75,84.2 72.01,93.73 85.09,78.13 74.55,91.19 69.22,88.42
  pour Top (isolate 0.305): 50.8,73.66 50.8,96.27 91.95,96.27 91.95,82.17 88.65,82.17 88.65,77.34 91.95,77.34 91.95,73.66
  pour Bottom (isolate 0.305): 50.8,96.27 50.8,73.66 86.74,73.66 86.74,96.27
GND11  (via drill 0.51)
  Top 0.254: U36.28 121.45,84.15 C57.2
  other vias: 104.27,75.31 106.55,84.2 122.81,93.73 135.89,78.13 125.35,91.19 120.02,88.42
  pour Top (isolate 0.305): 101.6,73.66 101.6,96.27 142.75,96.27 142.75,82.17 139.45,82.17 139.45,77.34 142.75,77.34 142.75,73.66
  pour Bottom (isolate 0.305): 101.6,96.27 101.6,73.66 137.54,73.66 137.54,96.27
GND12  (via drill 0.51)
  Top 0.254: U39.28 19.85,107.26 C62.2
  other vias: 2.67,98.42 4.95,107.31 21.21,116.84 34.29,101.24 23.75,114.3 18.41,111.53
  pour Top (isolate 0.305): 0,96.77 0,119.38 41.15,119.38 41.15,105.28 37.85,105.28 37.85,100.46 41.15,100.46 41.15,96.77
  pour Bottom (isolate 0.305): 0,119.38 0,96.77 35.94,96.77 35.94,119.38
GND13  (via drill 0.51)
  Top 0.254: U42.28 70.65,107.26 C67.2
  other vias: 53.47,98.42 55.75,107.31 72.01,116.84 85.09,101.24 74.55,114.3 69.22,111.53
  pour Top (isolate 0.305): 50.8,96.77 50.8,119.38 91.95,119.38 91.95,105.28 88.65,105.28 88.65,100.46 91.95,100.46 91.95,96.77
  pour Bottom (isolate 0.305): 50.8,119.38 50.8,96.77 86.74,96.77 86.74,119.38
GND14  (via drill 0.51)
  Top 0.254: U45.28 121.45,107.26 C72.2
  other vias: 104.27,98.42 106.55,107.31 122.81,116.84 135.89,101.24 125.35,114.3 120.02,111.53
  pour Top (isolate 0.305): 101.6,96.77 101.6,119.38 142.75,119.38 142.75,105.28 139.45,105.28 139.45,100.46 142.75,100.46 142.75,96.77
  pour Bottom (isolate 0.305): 101.6,119.38 101.6,96.77 137.54,96.77 137.54,119.38
N$1  (via drill 0.51)
  Top 0.254: R12.2 v61.34,5.59 R13.1 | U4.1 71.67,9.99 v72.52,9.14
  Bottom 0.254: v61.34,5.59 61.59,5.33 72.01,5.33 72.77,6.1 72.77,8.89 v72.52,9.14
N$2  (via drill 0.51)
  Top 0.254: R5.2 v10.54,5.59 R6.1 | U1.1 20.87,9.99 v21.72,9.14
  Bottom 0.254: v10.54,5.59 10.79,5.33 21.21,5.33 21.97,6.1 21.97,8.89 v21.72,9.14
N$3  (via drill 0.51)
  Top 0.254: R19.2 v112.14,5.59 R20.1 | U7.1 122.47,9.99 v123.32,9.14
  Bottom 0.254: v112.14,5.59 112.4,5.33 122.81,5.33 123.57,6.1 123.57,8.89 v123.32,9.14
N$4  (via drill 0.51)
  Top 0.254: R26.2 v10.54,28.7 R27.1 | U10.1 20.87,33.1 v21.72,32.26
  Bottom 0.254: v10.54,28.7 10.79,28.45 21.21,28.45 21.97,29.21 21.97,32 v21.72,32.26
N$5  (via drill 0.51)
  Top 0.254: R33.2 v61.34,28.7 R34.1 | U13.1 71.67,33.1 v72.52,32.26
  Bottom 0.254: v61.34,28.7 61.59,28.45 72.01,28.45 72.77,29.21 72.77,32 v72.52,32.26
N$6  (via drill 0.51)